# Altium PCB back_STM32F405.PcbDoc (part 1 of 2)
Units mil, origin at the board's own origin, x right, y up, seen from the top; angles counter-clockwise.
Board outline 3149.61 x 3937.01 mil, 4 copper layers (Top Layer, GND02, PWR03, Bottom Layer), stack 23.756 mil thick; 194 components, 149 nets, 1258 pads, 42 vias.
Unrouted connection lines stored in the file: 522.
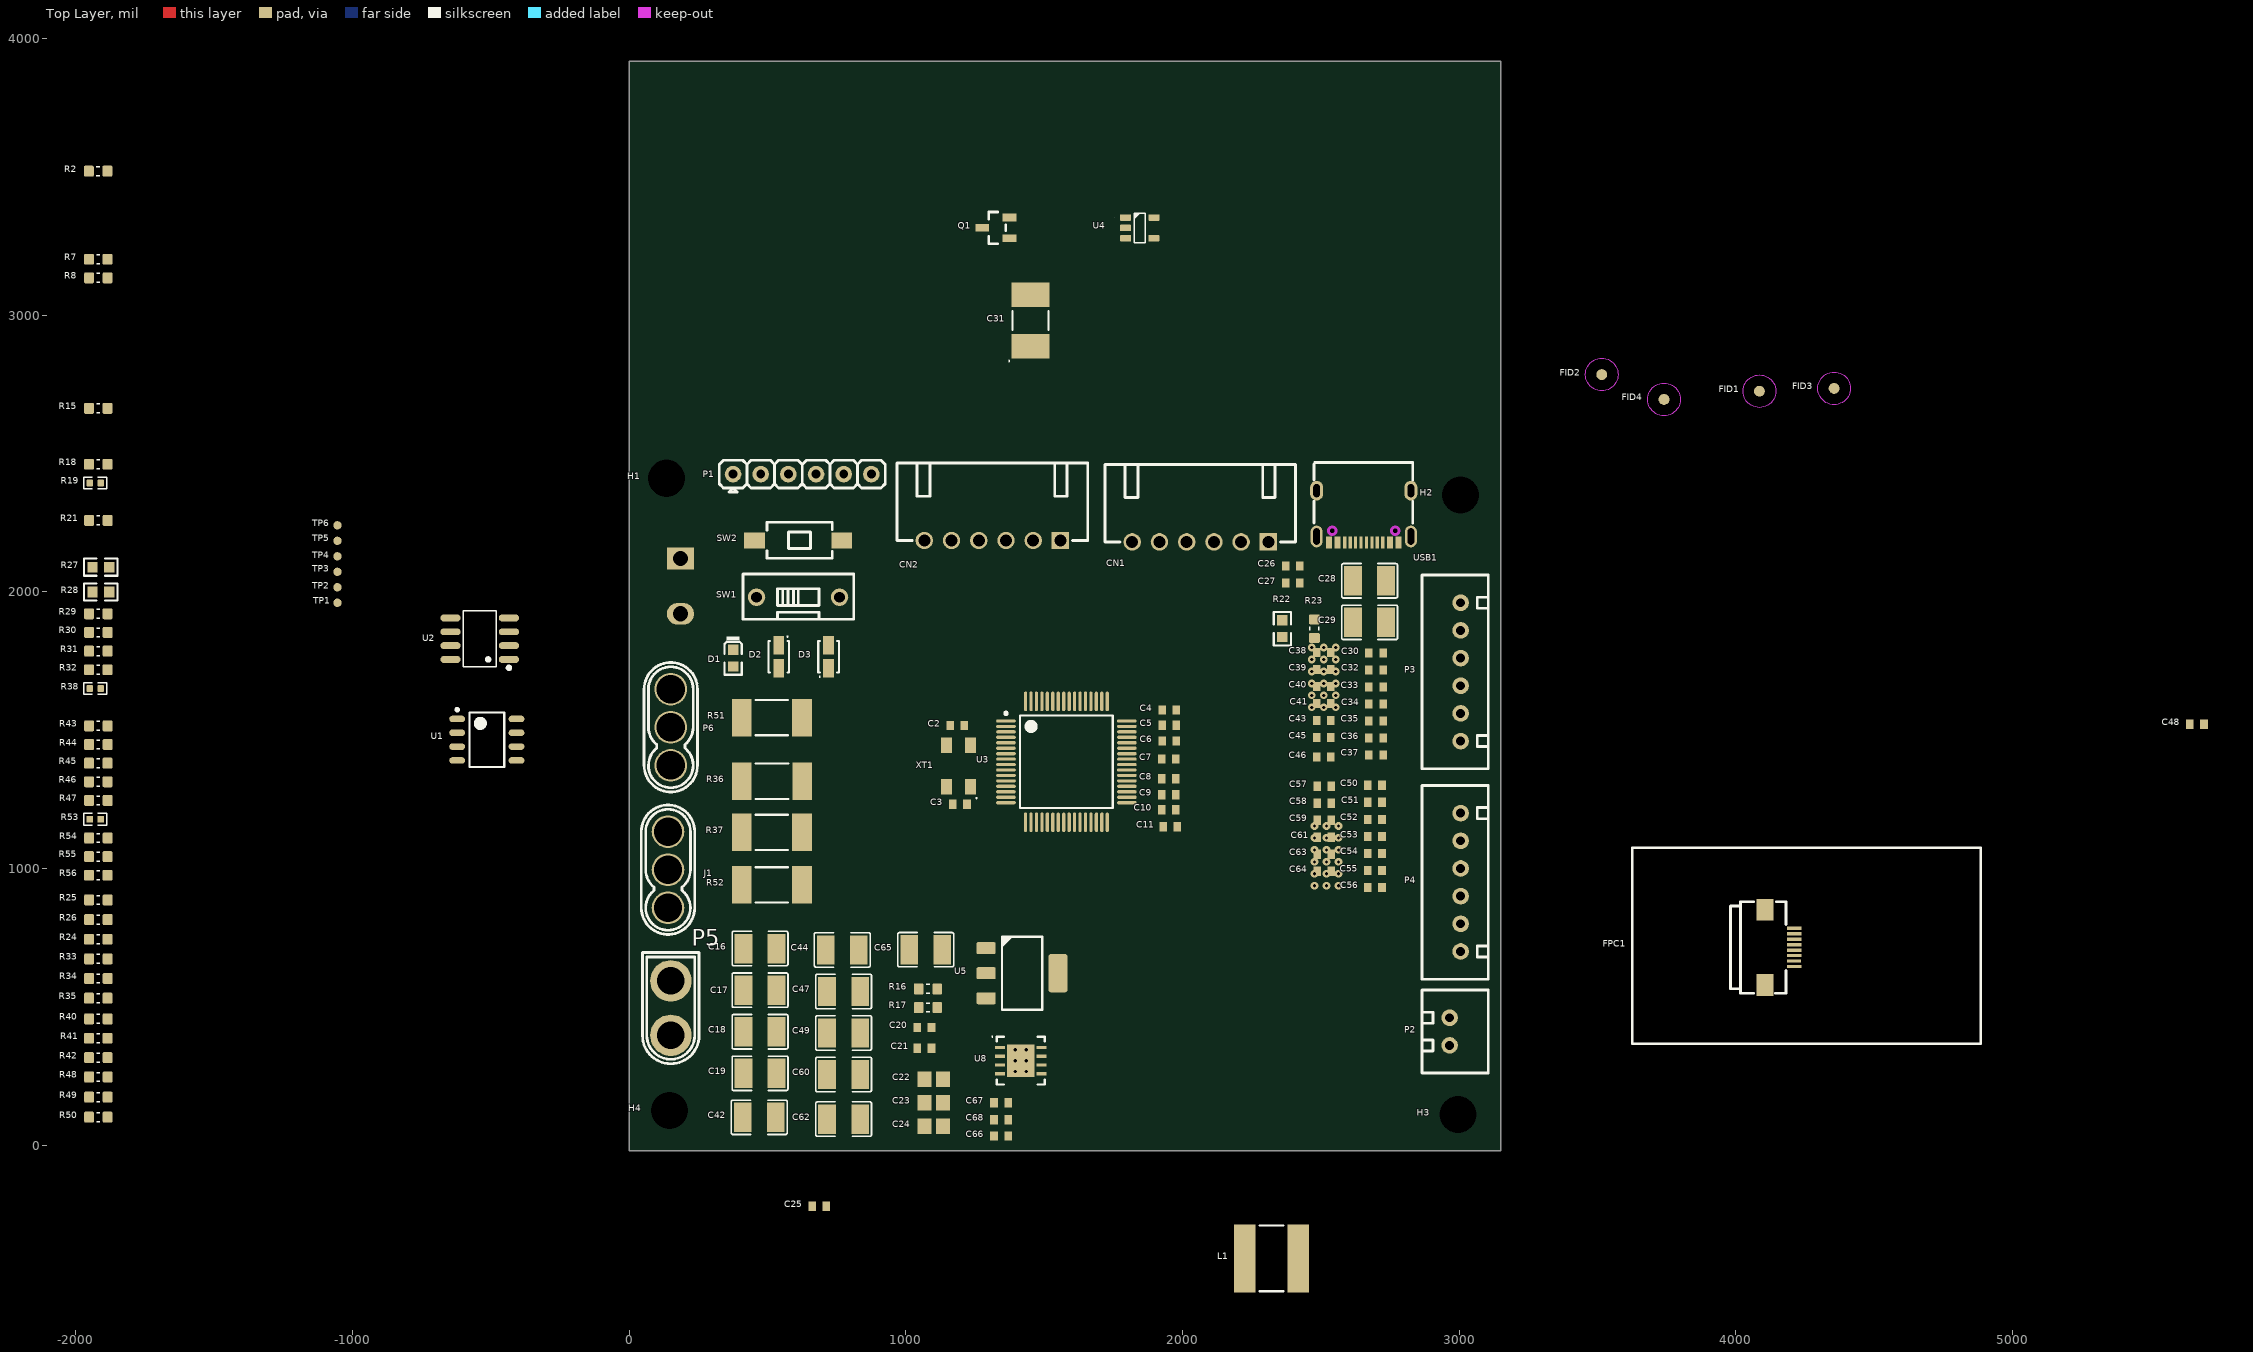
[diagram p0: Top Layer view]
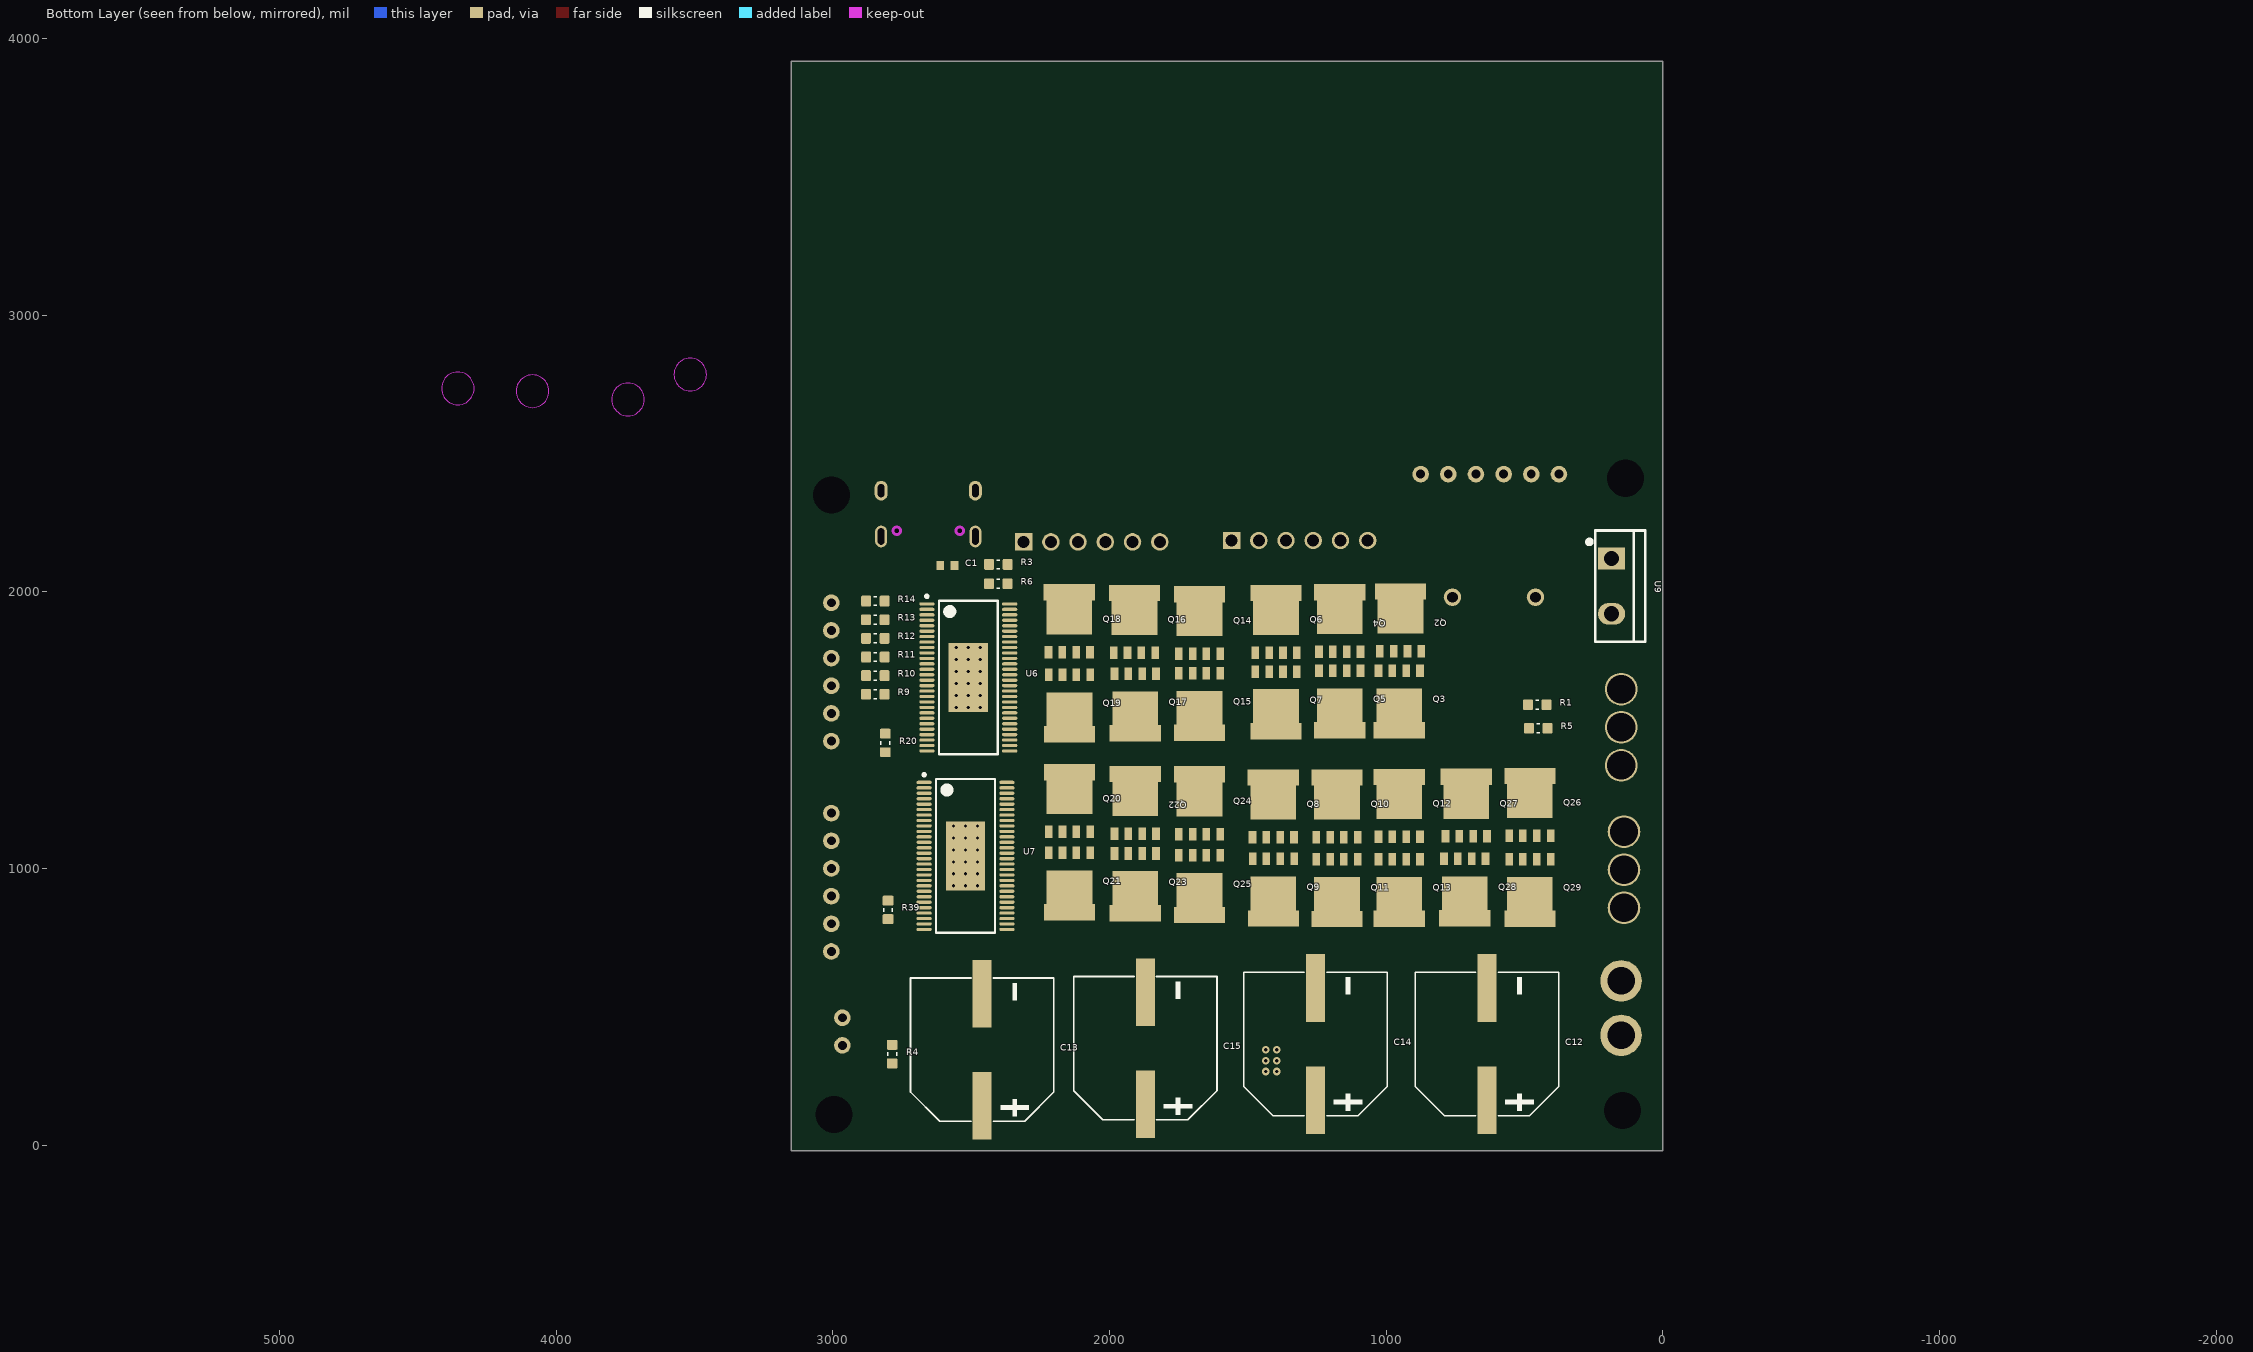
[diagram p1: Bottom Layer view, seen from below]
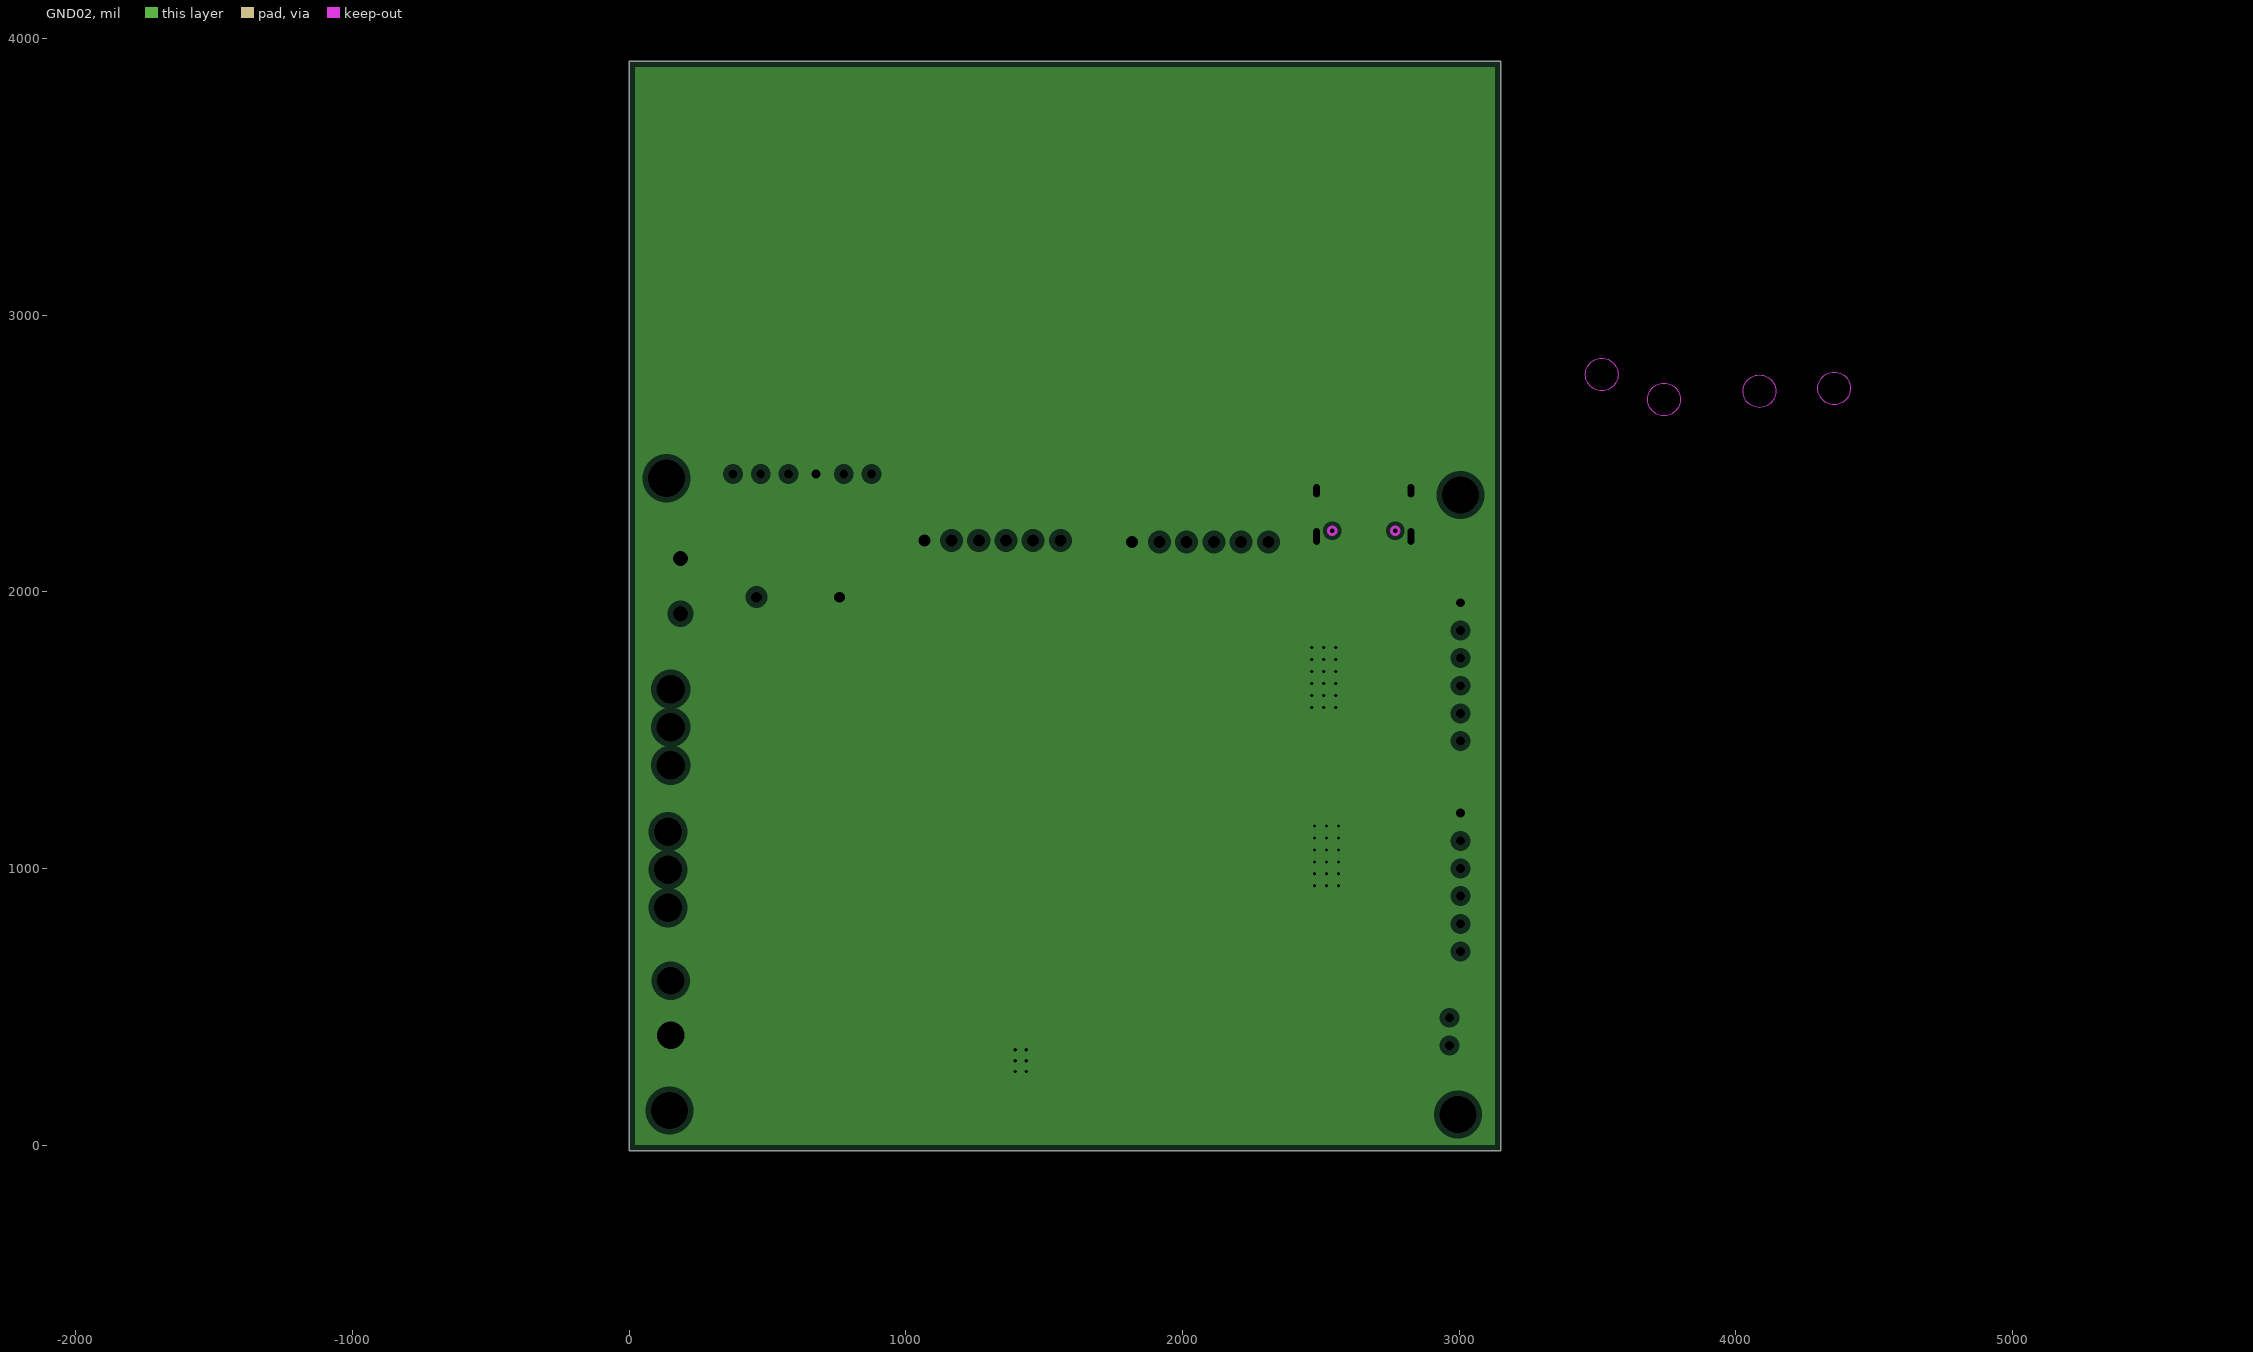
[diagram p2: GND02, clearances drawn from the general rule]
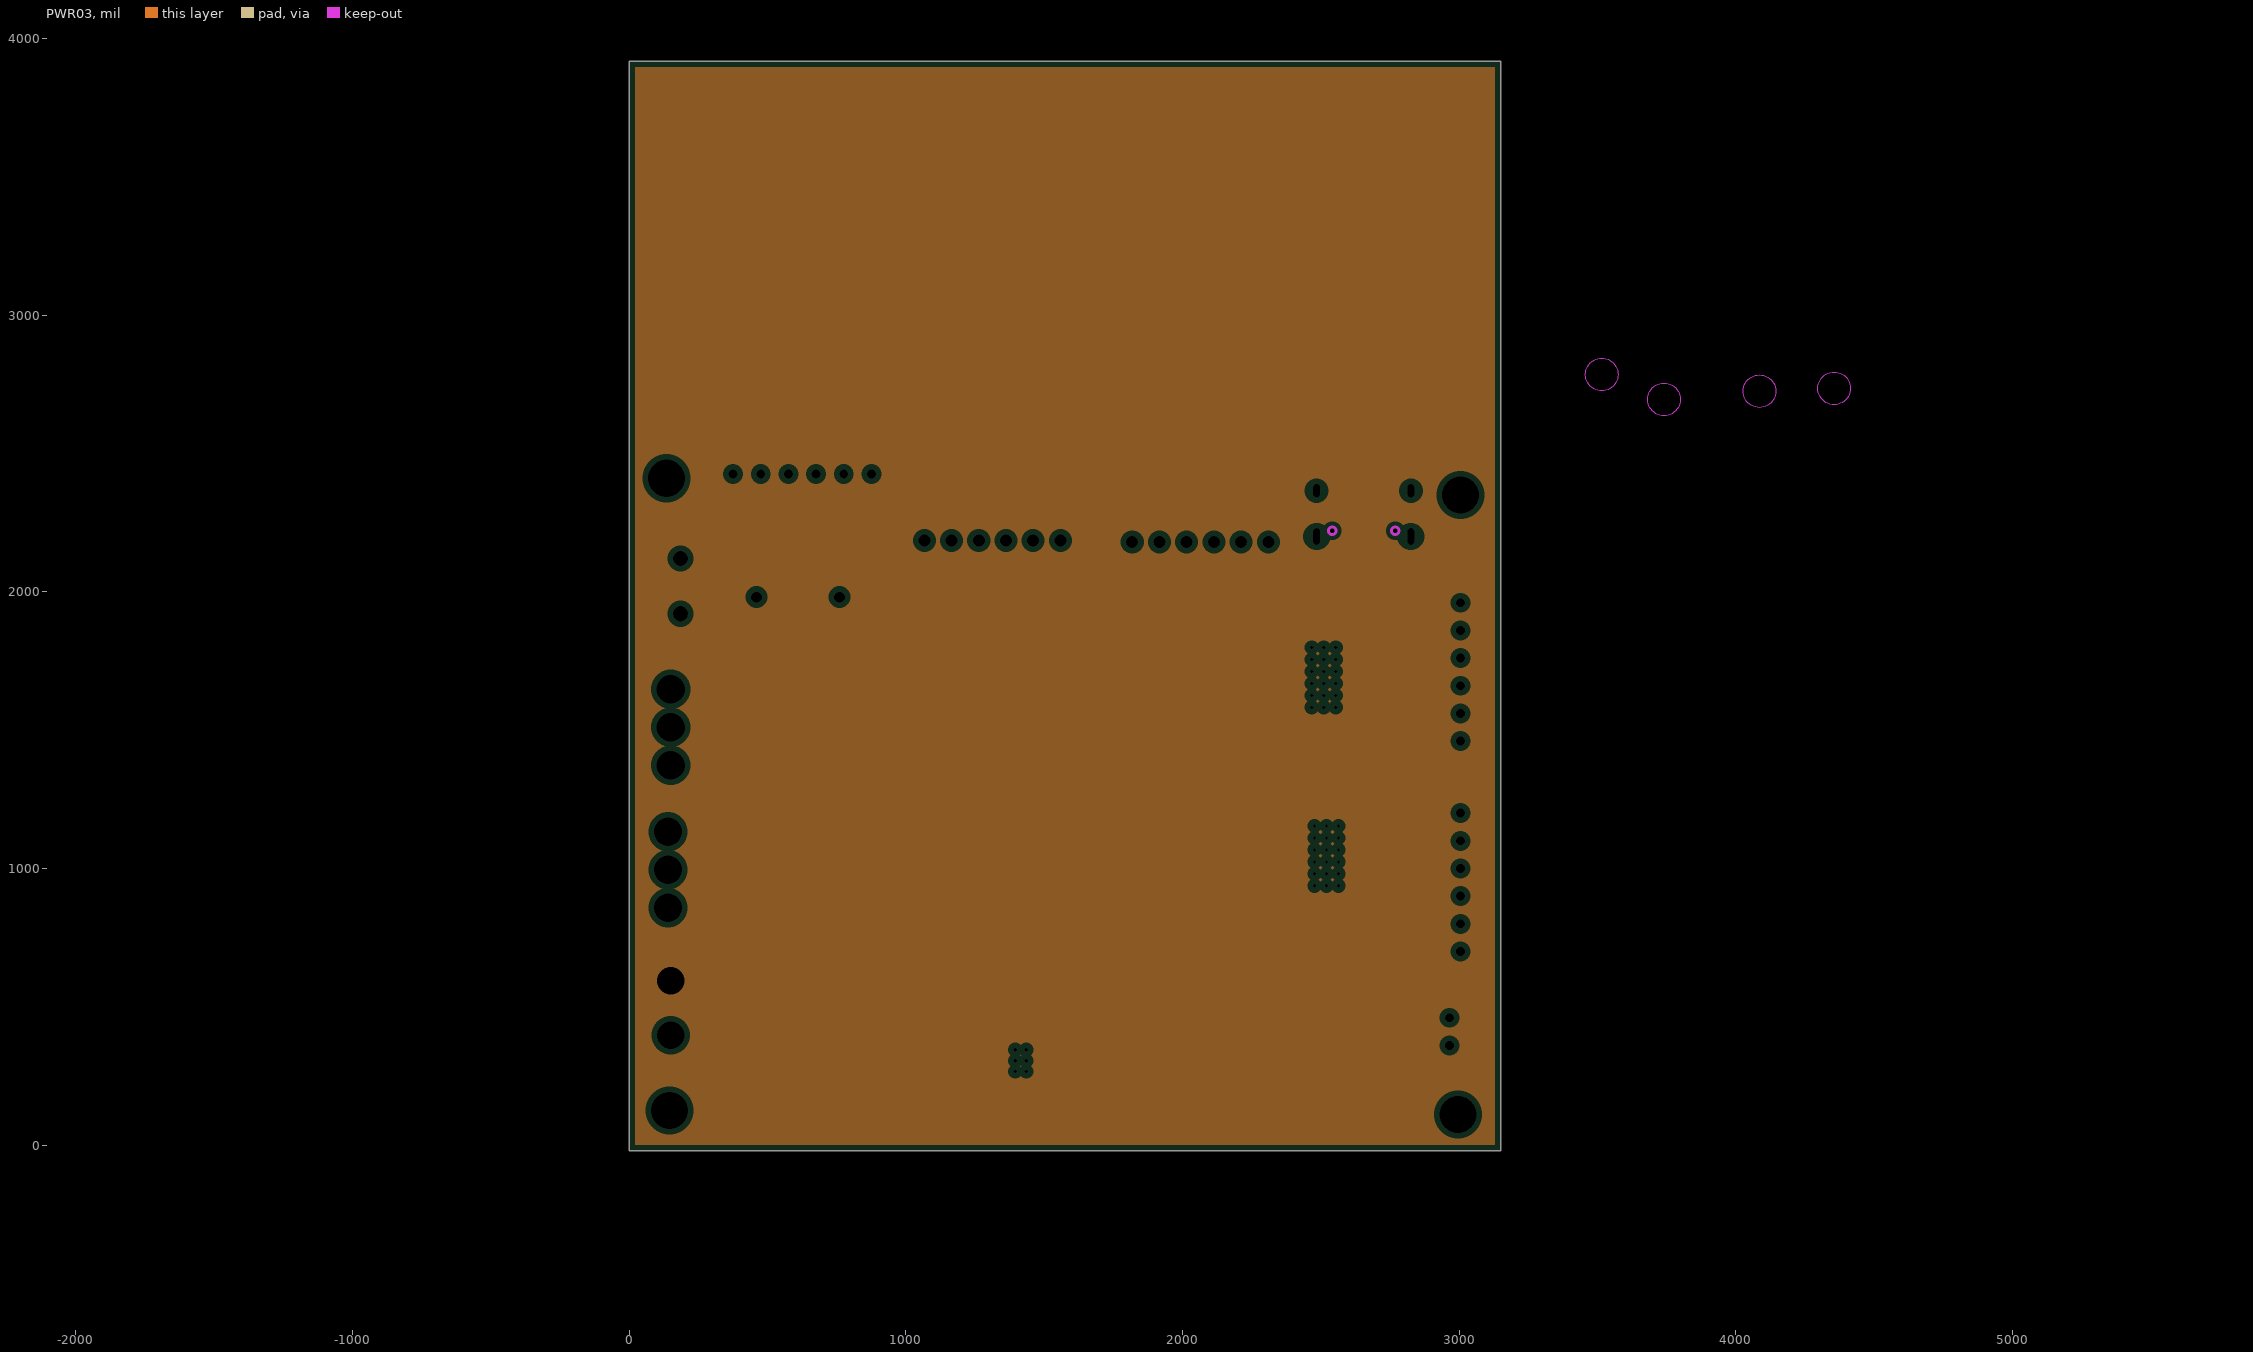
[diagram p3: PWR03, clearances drawn from the general rule]

## Layer stack, top to bottom
Top Solder: solder mask 0.4, Solder Resist, Dk 3.5
Top Layer: signal copper 1.4
Dielectric 2: prepreg 2.8, PP-006, Dk 4.1
GND02: plane copper 1.378, net AGND
Dielectric 1: dielectric 12.6, FR-4, Dk 4.8
PWR03: plane copper 1.378, net DCBUS
Dielectric 3: prepreg 2.8, PP-006, Dk 4.1
Bottom Layer: signal copper 1.4
Bottom Solder: solder mask 0.4, Solder Resist, Dk 3.5

## Board outline
0,-20.29 0,3916.72 3149.61,3916.72 3149.61,-20.29

## Design rules (kind name [scope] priority, off if disabled: settings)
Clearance [All] p1: gap=10 ignorepadtopadclearanceinfootprint=FALSE except(0: Arc-Hole Track-Hole SMDPad-Hole THPad-Hole Via-Hole Fill-Hole Poly-Hole Region-Hole Text-Hole)
PlaneClearance [All] p1: clearance=20
PlaneConnect [All] p1: planeconnectstyle=Relief reliefexpansion=20 reliefentries=4 reliefconductorwidth=10 reliefairgap=10
PolygonConnect [All] p1: connectstyle=Relief reliefconductorwidth=10 reliefentries=4 polygonreliefangle="90 Angle" airgapwidth=10
RoutingVias [All] p1: holewidth=28 width=50 viastyle="Through Hole" minholewidth=28 minwidth=50 maxholewidth=28 maxwidth=50
SolderMaskExpansion [All] p1: expansion=4 istentingtop=FALSE
Width [All] p1: maxlimit=10 minlimit=10 preferedwidth=10
28 further rules are at their usual default settings.

## Classes and differential pairs
component class U_DRV8301_Power: C25 C26 C27 C28 C29 C30 C31 C32 C33 C34 C35 C36 C37 C38 C39 C40 C41 C42 C43 C44 C45 C46 C47 D2 J1 L1 Q2 Q3 Q4 Q5 Q6 Q7 Q8 Q9 Q10 Q11 Q12 Q13 R19 R20 R21 R22 R23 R24 R25 R26 R27 R28 R29 R30 R31 R32 R33 R34 R35 R36 R37 TP3 TP4 U6
component class U_DRV8301_NoPower: C48 C49 C50 C51 C52 C53 C54 C55 C56 C57 C58 C59 C60 C61 C62 C63 C64 C65 P6 Q14 Q15 Q16 Q17 Q18 Q19 Q20 Q21 Q22 Q23 Q24 Q25 R38 R39 R40 R41 R42 R43 R44 R45 R46 R47 R48 R49 R50 R51 R52 TP5 TP6 U7
component class U_AuxHalf: C66 C67 C68 D3 Q26 Q27 Q28 Q29 R53 R54 R55 R56 U8 U9
component class STM32F405: C1 C2 C3 C4 C5 C6 C7 C8 C9 C10 C11 C12 C13 C14 C15 C16 C17 C18 C19 C20 C21 C22 C23 C24 CN1 CN2 D1 FID1 FID2 FID3 FID4 FPC1 H1 H2 H3 H4 P1 P2 P3 P4 P5 Q1 R1 R2 R3 R4 R5 R6 R7 R8 R9 R10 R11 R12 R13 R14 R15 R16 R17 R18 SW1 SW2 TP1 TP2 U1 U2 U3 U4 U5 USB1 XT1

## Components (designator, comment, footprint, x,y, rotation, side; value= is the part's Value field where it differs from the comment)
C1 "0.1uF" CAPC1608X09L 2585.59,2095 r180 bottom
C2 "10pF" CAPC1608X09L 1185.03,1516.66 r0 top
C3 "10pF" CAPC1608X09L 1195.03,1231.94 r180 top
C4 "2.2µF" CAPC1608X09L 1951.77,1572.45 r0 top
C5 "2.2µF" CAPC1608X09L 1951.35,1517.33 r0 top
C6 "0.1uF" CAPC1608X09L 1951.77,1460.24 r0 top
C7 "0.1uF" CAPC1608X09L 1950,1395 r0 top
C8 "0.1uF" CAPC1608X09L 1949.8,1323.55 r0 top
C9 "0.1uF" CAPC1608X09L 1949.8,1266.46 r0 top
C10 "0.1uF" CAPC1608X09L 1949.8,1211.35 r0 top
C11 "0.1uF" CAPC1608X09L 1955,1150 r0 top
C12 "220uF" CAP-SMD_BD12.5-L13.0-W13.0-FD 635,365 r90 bottom
C13 "220uF" CAP-SMD_BD12.5-L13.0-W13.0-FD 2460,345 r90 bottom
C14 "220uF" CAP-SMD_BD12.5-L13.0-W13.0-FD 1255,365 r90 bottom
C15 "220uF" CAP-SMD_BD12.5-L13.0-W13.0-FD 1870,350 r90 bottom
C16 "4.7uF" C1210 472.55,710 r0 top
C17 "4.7uF" C1210 472.55,559.7 r180 top
C18 "4.7uF" C1210 472.55,409.4 r180 top
C19 "4.7uF" C1210 472.55,259.1 r180 top
C20 "2.2µF" CAPC1608X09L 1066.88,425.01 r180 top
C21 "2.2µF" CAPC1608X09L 1066.88,350.01 r180 top
C22 "GRM21BR61H475KE51L" CAPC2012X09N 1100.59,237.71 r0 top value=4.7uF
C23 "GRM21BR61H475KE51L" CAPC2012X09N 1100.59,152.62 r0 top value=4.7uF
C24 "GRM21BR61H475KE51L" CAPC2012X09N 1100.59,67.53 r0 top value=4.7uF
C25 "2.2µF" CAPC1608X09L 686.81,-221.23 r180 top
C26 "270pF" CAPC1608X09L 2398.42,2092.95 r180 top
C27 "82pF" CAPC1608X09L 2398.42,2031.49 r180 top
C28 "4.7uF" C1210 2675.94,2039.46 r180 top
C29 "4.7uF" C1210 2675.94,1889.15 r180 top
C30 "0.1uF" CAPC1608X09L 2698.98,1778.58 r180 top
C31 "68uF" CAPCP6032X28N 1450,2980 r90 top
C32 "0.022µF" CAPC1608X09L 2698.98,1717.12 r180 top
C33 "0.022µF" CAPC1608X09L 2698.98,1655.65 r180 top
C34 "2.2µF" CAPC1608X09L 2698.98,1594.19 r180 top
C35 "2.2µF" CAPC1608X09L 2698.98,1532.72 r180 top
C36 "0.022µF" CAPC1608X09L 2698.98,1471.26 r0 top
C37 "0.022µF" CAPC1608X09L 2698.98,1409.79 r0 top
C38 "2200pF" CAPC1608X09L 2510,1780 r180 top
C39 "2.2µF" CAPC1608X09L 2510,1718.54 r180 top
C40 "2.2µF" CAPC1608X09L 2510,1657.07 r180 top
C41 "2200pF" CAPC1608X09L 2510,1595.61 r180 top
C42 "4.7uF" C1210 469.74,100 r180 top
C43 "2.2µF" CAPC1608X09L 2510,1534.14 r180 top
C44 "4.7uF" C1210 769.74,705 r180 top
C45 "2200pF" CAPC1608X09L 2510,1472.68 r180 top
C46 "2200pF" CAPC1608X09L 2510,1402.6 r180 top
C47 "4.7uF" C1210 774.74,555 r180 top
C48 "2.2µF" CAPC1608X09L 5666.1,1521.21 r180 top
C49 "4.7uF" C1210 774.74,405 r180 top
C50 "0.022µF" CAPC1608X09L 2695.03,1299.92 r180 top
C51 "0.022µF" CAPC1608X09L 2695.03,1238.46 r180 top
C52 "2.2µF" CAPC1608X09L 2695.03,1176.99 r180 top
C53 "2.2µF" CAPC1608X09L 2695.03,1115.53 r180 top
C54 "0.022µF" CAPC1608X09L 2695.03,1054.06 r180 top
C55 "0.022µF" CAPC1608X09L 2695.03,992.6 r180 top
C56 "2200pF" CAPC1608X09L 2695.03,931.13 r180 top
C57 "2.2µF" CAPC1608X09L 2511.81,1296.73 r180 top
C58 "2.2µF" CAPC1608X09L 2511.81,1235.27 r180 top
C59 "2200pF" CAPC1608X09L 2511.81,1173.8 r180 top
C60 "4.7uF" C1210 774.74,255 r180 top
C61 "2.2µF" CAPC1608X09L 2511.81,1112.34 r180 top
C62 "4.7uF" C1210 774.74,93.65 r180 top
C63 "2200pF" CAPC1608X09L 2511.81,1050.87 r180 top
C64 "2200pF" CAPC1608X09L 2511.81,989.41 r180 top
C65 "4.7uF" C1210 1071.56,705.9 r180 top
C66 "2.2µF" CAPC1608X09L 1343.78,32.31 r180 top
C67 "0.1uF" CAPC1608X09L 1343.78,152.62 r180 top
C68 "2.2µF" CAPC1608X09L 1343.78,91.15 r180 top
CN1 "X8821WR-06S-N0SN" CONN-TH_6P-P2.50_X8821WR-06S-N2SN 2063.93,2180 r180 top
CN2 "X8821WR-06S-N0SN" CONN-TH_6P-P2.50_X8821WR-06S-N2SN 1312.36,2185 r180 top
D1 "绿灯 0603" 0603_LED_S1 375.31,1760 r270 top
D2 "MBR140SFT1G" DIOM2717X10N 540.31,1765 r270 top
D3 "MBR140SFT1G" DIOM2717X10N 720.31,1765 r90 top
FID1 "FIDUCIAL" FIDUCIAL 4085,2724.69 r0 top
FID2 "FIDUCIAL" FIDUCIAL 3515,2784.97 r90 top
FID3 "FIDUCIAL" FIDUCIAL 4355,2734.97 r90 top
FID4 "FIDUCIAL" FIDUCIAL 3740,2694.97 r90 top
FPC1 "AFC01-S08FCA-00" FPC-SMD_P0.50-8P_FGS-XJ-H2.0 4157.75,714.18 r90 top
H1 "M3 Hole" "M3 Hole" 135,2410 r0 top
H2 "M3 Hole" "M3 Hole" 3005,2350 r0 top
H3 "M3 Hole" "M3 Hole" 2995,110 r0 top
H4 "M3 Hole" "M3 Hole" 145,125 r0 top
J1 "M3—DCBUS" CONN-TH_MR30-M 140,995 r90 top (schematic designator P5)
L1 "22uH" INDC6060X28N 2321.85,-410 r180 top
P1 "Header 6" SIP-6 625,2425 r0 top
P2 "Header 2" XH254-2 2965,410 r270 top
P3 "Header 6" XH254-6 3005,1710 r90 top
P4 "Header 6" XH254-6 3005,949.53 r90 top
P5 "Header 2" CONN-TH_XT30U-M 150,495 r270 top
P6 "Header 3" CONN-TH_MR30-M 150,1510 r90 top
Q1 "8550_SMT" SOT-23(SOT-23-3) 1325,3315 r0 top
Q2 "NTMFS5C628NLT" SO8FL 947.31,1892.68 r180 bottom
Q3 "NTMFS5C628NLT" SO8FL 952.31,1607.21 r0 bottom
Q4 "NTMFS5C628NLT" SO8FL 1167.31,1890.13 r180 bottom
Q5 "NTMFS5C628NLT" SO8FL 1167.31,1607.21 r0 bottom
Q6 "NTMFS5C628NLT" SO8FL 1397.31,1887.25 r180 bottom
Q7 "NTMFS5C628NLT" SO8FL 1397.59,1604.14 r0 bottom
Q8 "NTMFS5C628NLT" SO8FL 1407.59,1220.13 r180 bottom
Q9 "NTMFS5C628NLT" SO8FL 1407.31,927.21 r0 bottom
Q10 "NTMFS5C628NLT" SO8FL 1177.31,1220.13 r180 bottom
Q11 "NTMFS5C628NLT" SO8FL 1177.31,925.4 r0 bottom
Q12 "NTMFS5C628NLT" SO8FL 952.31,1222.13 r180 bottom
Q13 "NTMFS5C628NLT" SO8FL 952.31,925.68 r0 bottom
Q14 "NTMFS5C628NLT" SO8FL 1674.21,1882.72 r180 bottom
Q15 "NTMFS5C628NLT" SO8FL 1674.21,1597.88 r0 bottom
Q16 "NTMFS5C628NLT" SO8FL 1909.35,1886.82 r180 bottom
Q17 "NTMFS5C628NLT" SO8FL 1906.5,1596.07 r0 bottom
Q18 "NTMFS5C628NLT" SO8FL 2145.18,1889.16 r180 bottom
Q19 "NTMFS5C628NLT" SO8FL 2144.49,1592.88 r0 bottom
Q20 "NTMFS5C628NLT" SO8FL 2144.49,1239.53 r180 bottom
Q21 "NTMFS5C628NLT" SO8FL 2144.49,949.53 r0 bottom
Q22 "NTMFS5C628NLT" SO8FL 1906.5,1233 r180 bottom
Q23 "NTMFS5C628NLT" SO8FL 1906.5,946.35 r0 bottom
Q24 "NTMFS5C628NLT" SO8FL 1674.21,1231.27 r180 bottom
Q25 "NTMFS5C628NLT" SO8FL 1674.21,939.81 r0 bottom
Q26 "NTMFS5C628NLT" SO8FL 480.18,1225.4 r180 bottom
Q27 "NTMFS5C628NLT" SO8FL 710.18,1222.53 r180 bottom
Q28 "NTMFS5C628NLT" SO8FL 715.45,927.49 r0 bottom
Q29 "NTMFS5C628NLT" SO8FL 480.18,925.95 r0 bottom
R1 "22R" RESC1608X55N 453.54,1591.46 r180 bottom
R2 "1k" RESC1608X55N -1920,3520 r0 top
R3 "22R" RESC1608X55N 2401.46,2098.54 r180 bottom
R4 "120R" RESC1608X55N 2785,328.46 r90 bottom
R5 "22R" RESC1608X55N 450.07,1506.46 r180 bottom
R6 "22R" RESC1608X55N 2401.46,2028.54 r180 bottom
R7 "10K" RESC1608X55N -1919.25,3201.78 r0 top
R8 "22R" RESC1608X55N -1919.25,3134.41 r0 top
R9 "3.3k" RESC1608X55N 2846,1629.26 r0 bottom
R10 "3.3k" RESC1608X55N 2846,1696.63 r180 bottom
R11 "3.3k" RESC1608X55N 2846,1764 r0 bottom
R12 "3.3k" RESC1608X55N 2846,1831.37 r180 bottom
R13 "3.3k" RESC1608X55N 2846,1898.74 r180 bottom
R14 "3.3k" RESC1608X55N 2846,1966.11 r180 bottom
R15 "47K" RESC1608X55N -1919.25,2662.82 r180 top
R16 "10K" RESC1608X55N 1079.45,564.17 r180 top
R17 "1k" RESC1608X55N 1079.45,496.8 r180 top
R18 "1k" RESC1608X55N -1919.25,2460.71 r180 top
R19 "NCP15XH103F03RC" RESC1005X40N -1930.59,2392.87 r180 top value=10k
R20 "3.3k" RESC1608X55N 2810,1453.46 r270 bottom
R21 "220k" RESC1608X55N -1919.25,2257.66 r180 top
R22 "18k" 0603_R 2360.39,1866.38 r270 top
R23 "47K" RESC1608X55N 2476.14,1866.37 r270 top
R24 "2.2R" RESC1608X55N -1919.25,743.74 r180 top
R25 "2.2R" RESC1608X55N -1919.25,885.74 r180 top
R26 "2.2R" RESC1608X55N -1919.25,814.74 r180 top
R27 "3.3k" 0603_R -1910.06,2088.86 r180 top
R28 "18k" 0603_R -1910.06,1998.78 r180 top
R29 "120R" RESC1608X55N -1919.25,1920.05 r180 top
R30 "120R" RESC1608X55N -1919.25,1852.68 r180 top
R31 "22R" RESC1608X55N -1919.25,1785.31 r180 top
R32 "22R" RESC1608X55N -1919.25,1717.94 r180 top
R33 "2.2R" RESC1608X55N -1919.25,672.74 r180 top
R34 "2.2R" RESC1608X55N -1919.25,601.74 r180 top
R35 "2.2R" RESC1608X55N -1919.25,530.74 r180 top
R36 "CSR2512C0R0005F" RESC6432X09N 515.31,1315 r180 top value=500uOhm
R37 "CSR2512C0R0005F" RESC6432X09N 515,1130 r180 top value=500uOhm
R38 "NCP15XH103F03RC" RESC1005X40N -1930.59,1650.11 r180 top value=10k
R39 "3.3k" RESC1608X55N 2800,850 r270 bottom
R40 "2.2R" RESC1608X55N -1919.25,455.74 r180 top
R41 "2.2R" RESC1608X55N -1919.25,385.74 r180 top
R42 "2.2R" RESC1608X55N -1919.25,315.74 r180 top
R43 "18k" RESC1608X55N -1919.25,1514.9 r180 top
R44 "120R" RESC1608X55N -1919.25,1447.53 r180 top
R45 "120R" RESC1608X55N -1919.25,1380.16 r180 top
R46 "22R" RESC1608X55N -1919.25,1312.79 r180 top
R47 "22R" RESC1608X55N -1919.25,1245.42 r180 top
R48 "2.2R" RESC1608X55N -1919.25,245.74 r180 top
R49 "2.2R" RESC1608X55N -1919.25,173.11 r180 top
R50 "2.2R" RESC1608X55N -1919.25,100.74 r180 top
R51 "CSR2512C0R0005F" RESC6432X09N 515,1545 r180 top value=500uOhm
R52 "CSR2512C0R0005F" RESC6432X09N 515,940 r180 top value=500uOhm
R53 "NCP15XH103F03RC" RESC1005X40N -1930.59,1177.58 r180 top value=10k
R54 "2.2R" RESC1608X55N -1919.25,1109.74 r180 top
R55 "3.3k" RESC1608X55N -1919.25,1042.37 r180 top
R56 "2.2R" RESC1608X55N -1919.25,975 r180 top
SW1 "DSWB01LHGET" SW-TH_DSWB01LHGET 610,1980 r90 top
SW2 "TS-1101-C-W" SW-SMD_L6.0-W3.3-LS8.0 610,2185 r180 top
TP1 "TESTPOINT" TP-R30 -1055,1959.98 r90 top
TP2 "TESTPOINT" TP-R30 -1055,2015.99 r90 top
TP3 "TESTPOINT" TP-R30 -1055,2071.99 r90 top
TP4 "TESTPOINT" TP-R30 -1055,2127.99 r90 top
TP5 "TESTPOINT" TP-R30 -1055,2184 r90 top
TP6 "TESTPOINT" TP-R30 -1055,2240 r90 top
U1 "SN65HVD232D" SOIC127P600X175-8N -515,1465 r0 top
U2 "CH340N" "ch340N  SOP-8_L4.9-W3.9-P1.27-LS6.0-BL" -540.61,1830 r90 top
U3 "STM32F405RGT6" STM-LQFP64_N 1580,1385 r0 top
U4 "3.3V" SOT23-5 1845,3315 r0 top
U5 "3.3V" SOT223 1419.79,620.91 r0 top
U6 "DRV8301" TSSOP50P810X120_HS-57N 2510,1690 r180 bottom
U7 "DRV8301" TSSOP50P810X120_HS-57N 2520,1045 r180 bottom
U8 "LM5109BSD/NOPB" SON80P400X80_HS-9N 1415,305 r0 top
U9 "3Ω" TO-220-2L_L10.2-W4.6-P5.08-L 185,2020 r270 bottom
USB1 "TYPE-C 16PIN 2MD(073)" USB-C-SMD_TYPE-C-16PIN-2MD-073 2782.68,2177.01 r180 top
XT1 "8 MHz" DFN220P320X110-4N 1190,1370 r90 top

## Footprints (in the part's own frame and the unit in brackets; to place one, negate y for a bottom-side part, rotate by r counter-clockwise, add the part's x,y. Pads: shape width x height; smd on the part's side, far side on the other; paste and mask are expansions set on the pad)
0603_LED_S1 [mm]
  rect 0.93x0.98 smd: A(0.77,0) K(-0.77,0)
  silkscreen extent -1.97,-0.79 1.54,0.79, body extent -0.8,-0.4 0.8,0.4, height 0.6
0603_R [mm]
  rect 0.93x0.98 smd: 1(-0.77,0) 2(0.77,0)
  silkscreen extent -1.53,-0.79 1.54,0.79, body extent -0.85,-0.4 0.85,0.4, height 0.56
C1210 [mm]
  rect 1.635x2.7 smd paste-100 mask+0.051: 1(-1.517,0) 2(1.517,0)
  silkscreen extent -2.56,-1.58 2.56,1.58
CAP-SMD_BD12.5-L13.0-W13.0-FD [mm] "220uF 63V 贴片电容"
  rect 6.2x1.75 smd: 1(-5.145,0) 2(5.145,0)
  silkscreen extent -6.58,-6.58 6.58,6.58
CAPC1608X09L [mm] "Chip Capacitor, 2-Leads, Body 1.60x0.80mm, IPC High Density"
  rect 0.7x0.85 smd: 1(-0.65,0) 2(0.65,0)
  body extent -0.85,-0.45 0.85,0.45, height 0.9
CAPC2012X09N [mm] "Chip Capacitor, 2-Leads, Body 2.00x1.25mm, IPC Medium Density"
  rect 1.25x1.45 smd: 1(-0.85,0) 2(0.85,0)
  body extent -1.08,-0.7 1.07,0.7, height 0.95
CAPCP6032X28N [mm]
  rect 2.25x3.5 smd: 1(-2.375,0) 2(2.375,0)
  silkscreen extent -3.76,-1.65 0.85,2.01, body extent -3.15,-1.75 3.15,1.75, height 2.8
"ch340N  SOP-8_L4.9-W3.9-P1.27-LS6.0-BL" [mm]
  oval 0.63x1.865 smd: 1(-1.905,-2.682) 2(-0.635,-2.682) 3(0.635,-2.682) 4(1.905,-2.682) 5(1.905,2.682) 6(0.635,2.682) 7(-0.635,2.682) 8(-1.905,2.682)
  silkscreen extent -2.82,-2.83 2.58,1.52
CONN-TH_6P-P2.50_X8821WR-06S-N2SN [mm] "90度 弯插 6p"
  rect 1.6x1.6 hole 1.1: 1(-6.25,0)
  round 1.6 hole 1.1: 2(-3.75,0) 3(-1.25,0) 4(1.25,0) 5(3.75,0) 6(6.25,0)
  silkscreen extent -8.75,-7.11 8.75,0
CONN-TH_MR30-M [mm] "MR30航模电机插头"
  round 3 hole 2.6 paste-2539.97 mask+0.05: 1(-3.5,0) 2(0,0) 3(3.5,0)
  silkscreen extent -5.94,-2.45 5.94,2.45
CONN-TH_XT30U-M [mm] "xt30 插头"
  round 3.8 hole 2.54 paste-2539.97 mask+0.05: 1(-2.5,0) 2(2.5,0)
  silkscreen extent -5.1,-2.6 5.11,2.6
DFN220P320X110-4N [mm] "DFN, 4-Leads, Body 5.00x3.20mm, Pitch 2.20mm, IPC Medium Density"
  rect 1.4x1 smd: 1(-1.9,-1.1) 3(1.9,1.1) G(-1.9,1.1) G(1.9,-1.1)
  silkscreen extent -3,-1.7 -2.9,-1.6, body extent -2.55,-1.65 2.55,1.65, height 1.1
DIOM2717X10N [mm] "Molded Diode, 2-Leads, Body 2.70x1.65mm, IPC Medium Density"
  rect 1.7x1 smd: A(1.05,0) K(-1.05,0)
  silkscreen extent -1.9,-0.95 1.45,0.95, body extent -1.45,-0.9 1.45,0.9, height 1
FIDUCIAL [mm] "1mm fiducial with 3mm keepout"
  round 1 smd paste-1 mask+0.5: 0(0,0)
  Keep-Out Layer region: 0,-1.5 -0.574,-1.386 -1.061,-1.061 -1.386,-0.574 -1.5,0 -1.5,0 -1.386,0.574 -1.061,1.061 -0.574,1.386 0,1.5 0,1.5 0.574,1.386 1.061,1.061 1.386,0.574 1.5,0 1.5,0 1.386,-0.574 1.061,-1.061 0.574,-1.386 0,-1.5
FPC-SMD_P0.50-8P_FGS-XJ-H2.0 [mm]
  rect 0.3x1.3 smd paste+0 mask+0.05: 1(-1.75,-1.34) 2(-1.252,-1.338) 3(-0.75,-1.34) 4(-0.25,-1.34) 5(0.25,-1.34) 6(0.75,-1.34) 7(1.25,-1.34) 8(1.75,-1.34)
  rect 2x1.6 smd: 9(3.45,1.34) 10(-3.45,1.34)
  silkscreen extent -8.85,-18.47 9.15,13.52
INDC6060X28N [mm]
  rect 1.98x6.22 smd: 1(-2.46,0) 2(2.46,0)
  silkscreen extent -1.1,-3.01 1.1,3.01, body extent -3.1,-3.1 3.1,3.1, height 2.8
"M3 Hole" [mm] "M3 Hole with no copper"
  round 3 hole 3.4 unplated: 1(0,0)
RESC1005X40N [mm]
  round 0.2 on Mech15: 0(0,0)
  rrect20% 0.6x0.6 smd: 1(-0.5,0) 2(0.5,0)
  Top Layer pour cut-out: -0.325,0.375 -0.2,0.5 0.2,0.5 0.325,0.375 0.325,-0.375 0.2,-0.5 -0.2,-0.5 -0.325,-0.375
  silkscreen extent -1.05,-0.55 1.05,0.55, body extent -0.52,-0.27 0.53,0.28, height 0.4
RESC1608X55N [mm]
  round 0.254 on Mech15: 0(0,0)
  rrect25% 0.9x1 smd: 1(-0.85,0) 2(0.85,0)
  Top Layer pour cut-out: -0.6,0.5 -0.4,0.7 0.4,0.7 0.6,0.5 0.6,-0.5 0.4,-0.7 -0.4,-0.7 -0.6,-0.5
  silkscreen extent -0.15,-0.41 0.15,0.41, body extent -0.87,-0.47 0.88,0.48, height 0.54
RESC6432X09N [mm] "Chip Resistor, 2-Leads, Body 6.40x3.20mm, IPC Medium Density"
  rect 1.8x3.45 smd: 1(-2.775,0) 2(2.775,0)
  silkscreen extent -1.5,-1.63 1.5,1.63, body extent -3.32,-1.73 3.32,1.73, height 0.9
SIP-6 [mil]
  round 60 hole 32: 1(-250,0) 2(-150,0) 3(-50,0) 4(50,0) 5(150,0) 6(250,0)
  silkscreen extent -300,-65 300,50
SO8FL [mm] "DFN5 5x6, 1.27P  (SO-8FL)  CASE 488AA"
  rect 0.9x0.6 on Bottom Paste: 7(0,-0.55) 7(0,0.3) 7(0,1.15) 7(0,2) 9(-1.15,-0.55) 9(-1.15,0.3) 9(-1.15,1.15) 9(-1.15,2) 10(1.15,-0.55) 10(1.15,0.3) 10(1.15,1.15) 10(1.15,2)
  rect 0.6x0.9 on Bottom Paste: 11(-1.875,3) 11(-0.65,3) 11(0.65,3) 11(1.875,3)
  rect 4.2x2.2 smd paste-10 mask+0.075: D(0,0) D(0,1.35)
  rect 4.7x1.5 smd paste-10 mask+0.075: D(0,2.75)
  rect 0.7x1.15 smd paste-0.05 mask+0.075: G(1.905,-2.725) S(-1.905,-2.725) S(-0.635,-2.725) S(0.635,-2.725)
  body extent -2.57,-2.95 2.58,3.2, height 1.13
SOIC127P600X175-8N [mm] "SOIC, 8-Leads, Body 4.90x3.90mm, Pitch 1.27mm, IPC Medium Density"
  oval 1.45x0.6 smd: 1(-2.725,1.905) 2(-2.725,0.635) 3(-2.725,-0.635) 4(-2.725,-1.905) 5(2.725,-1.905) 6(2.725,-0.635) 7(2.725,0.635) 8(2.725,1.905)
  silkscreen extent -2.85,-2.5 1.6,2.88, body extent -2,-2.5 2,2.5, height 1.75
SON80P400X80_HS-9N [mm] "SON, 8-Leads, Body 4.00x4.00mm, Pitch 0.80mm, Thermal Pad 3.00x2.49mm, IPC Medium Density"
  rect 0.9x0.3 smd mask+0: 1(-1.895,1.2) 2(-1.895,0.4) 3(-1.895,-0.4) 4(-1.895,-1.2) 5(1.895,-1.2) 6(1.895,-0.4) 7(1.895,0.4) 8(1.895,1.2)
  rect 2.49x3 smd paste-1.245 mask+0: 9(0,0)
  silkscreen extent -2.65,-2.2 2.2,2.25, body extent -2.05,-2.05 2.05,2.05, height 0.8
SOT23-5 [mm]
  round 0.5 on Mech15: 0(0,0)
  rrect25% 1x0.6 smd: 1(-1.3,0.95) 2(-1.3,0) 3(-1.3,-0.95) 4(1.3,-0.95) 5(1.3,0.95)
  silkscreen extent -0.51,-1.35 0.51,1.35, body extent -1.4,-1.45 1.4,1.45, height 1.44
SOT223 [mm]
  round 1 on Mech15: 0(0,0)
  rrect25% 1.75x1.1 smd: 1(-3.3,2.3) 2(-3.3,0) 3(-3.3,-2.3)
  rrect25% 1.75x3.5 smd: 4(3.3,0)
  silkscreen extent -1.85,-3.35 1.85,3.35, body extent -3.65,-3.35 3.65,3.35, height 1.8
SOT-23(SOT-23-3) [mm]
  rect 1.25x0.7 smd: 1(1.25,-0.95) 2(1.25,0.95) 3(-1.25,0)
  silkscreen extent -0.65,-1.46 0.9,1.46, body extent -1.5,-1.5 1.5,1.5, height 1.3
STM-LQFP64_N [mm]
  oval 1.8x0.3 smd: 1(-5.55,3.75) 2(-5.55,3.25) 3(-5.55,2.75) 4(-5.55,2.25) 5(-5.55,1.75) 6(-5.55,1.25) 7(-5.55,0.75) 8(-5.55,0.25) 9(-5.55,-0.25) 10(-5.55,-0.75) 11(-5.55,-1.25) 12(-5.55,-1.75) 13(-5.55,-2.25) 14(-5.55,-2.75) 15(-5.55,-3.25) 16(-5.55,-3.75) 33(5.55,-3.75) 34(5.55,-3.25) 35(5.55,-2.75) 36(5.55,-2.25) 37(5.55,-1.75) 38(5.55,-1.25) 39(5.55,-0.75) 40(5.55,-0.25) 41(5.55,0.25) 42(5.55,0.75) 43(5.55,1.25) 44(5.55,1.75) 45(5.55,2.25) 46(5.55,2.75) 47(5.55,3.25) 48(5.55,3.75)
  oval 0.3x1.8 smd: 17(-3.75,-5.55) 18(-3.25,-5.55) 19(-2.75,-5.55) 20(-2.25,-5.55) 21(-1.75,-5.55) 22(-1.25,-5.55) 23(-0.75,-5.55) 24(-0.25,-5.55) 25(0.25,-5.55) 26(0.75,-5.55) 27(1.25,-5.55) 28(1.75,-5.55) 29(2.25,-5.55) 30(2.75,-5.55) 31(3.25,-5.55) 32(3.75,-5.55) 49(3.75,5.55) 50(3.25,5.55) 51(2.75,5.55) 52(2.25,5.55) 53(1.75,5.55) 54(1.25,5.55) 55(0.75,5.55) 56(0.25,5.55) 57(-0.25,5.55) 58(-0.75,5.55) 59(-1.25,5.55) 60(-1.75,5.55) 61(-2.25,5.55) 62(-2.75,5.55) 63(-3.25,5.55) 64(-3.75,5.55)
  silkscreen extent -5.67,-4.25 4.25,4.57, body extent -5,-5 5,5, height 1.6
SW-SMD_L6.0-W3.3-LS8.0 [mm] "轻触开关"
  rect 1.9x1.5 smd: 1(-4,0) 2(4,0)
  silkscreen extent -3.14,-1.67 2.86,1.63
SW-TH_DSWB01LHGET [mm] "单刀拨码开关"
  round 1.6 hole 1: 1(0,3.81) 2(0,-3.81)
  silkscreen extent -2.02,-5.11 2.13,5.05
TO-220-2L_L10.2-W4.6-P5.08-L [mm] "220封装2插电阻"
  rect 2x2.5 hole 1.4: 1(-2.54,0)
  oval 2x2.5 hole 1.4: 2(2.54,0)
  silkscreen extent -5.1,-2.23 5.1,3.1
TP-R30 [mil]
  round 30 smd paste-30 mask+3: 1(0,0)
  body extent -18,-18 18,18, height 10
TSSOP50P810X120_HS-57N [mm] "TSSOP, 56-Leads, Body 14.00x6.10mm, Pitch 0.50mm, Thermal Pad 6.35x3.61mm, IPC Medium Density"
  oval 1.4x0.3 smd: 1(-3.8,6.75) 2(-3.8,6.25) 3(-3.8,5.75) 4(-3.8,5.25) 5(-3.8,4.75) 6(-3.8,4.25) 7(-3.8,3.75) 8(-3.8,3.25) 9(-3.8,2.75) 10(-3.8,2.25) 11(-3.8,1.75) 12(-3.8,1.25) 13(-3.8,0.75) 14(-3.8,0.25) 15(-3.8,-0.25) 16(-3.8,-0.75) 17(-3.8,-1.25) 18(-3.8,-1.75) 19(-3.8,-2.25) 20(-3.8,-2.75) 21(-3.8,-3.25) 22(-3.8,-3.75) 23(-3.8,-4.25) 24(-3.8,-4.75) 25(-3.8,-5.25) 26(-3.8,-5.75) 27(-3.8,-6.25) 28(-3.8,-6.75) 29(3.8,-6.75) 30(3.8,-6.25) 31(3.8,-5.75) 32(3.8,-5.25) 33(3.8,-4.75) 34(3.8,-4.25) 35(3.8,-3.75) 36(3.8,-3.25) 37(3.8,-2.75) 38(3.8,-2.25) 39(3.8,-1.75) 40(3.8,-1.25) 41(3.8,-0.75) 42(3.8,-0.25) 43(3.8,0.25) 44(3.8,0.75) 45(3.8,1.25) 46(3.8,1.75) 47(3.8,2.25) 48(3.8,2.75) 49(3.8,3.25) 50(3.8,3.75) 51(3.8,4.25) 52(3.8,4.75) 53(3.8,5.25) 54(3.8,5.75) 55(3.8,6.25) 56(3.8,6.75)
  rect 3.61x6.35 smd: 57(0,0)
  silkscreen extent -3.93,-7.05 2.7,7.57, body extent -3.1,-7.05 3.1,7.05, height 1.2
USB-C-SMD_TYPE-C-16PIN-2MD-073 [mm]
  rect 0.55x1.1 smd paste-100 mask+0.05: 1(0.05,-0.025) 2(0.85,-0.025) 11(5.65,-0.025) 12(6.45,-0.025)
  rect 0.3x1.1 smd paste-100 mask+0.05: 3(1.5,-0.025) 4(2,-0.025) 5(2.5,-0.025) 6(3,-0.025) 7(3.5,-0.025) 8(4,-0.025) 9(4.5,-0.025) 10(5,-0.025)
  oval 1.1x2 hole 0.6 slot 1.5 at 90 deg paste-2539.97 mask+0.05: 13(-1.075,-0.575) 14(7.575,-0.575)
  oval 1.2x1.8 hole 0.6 slot 1.2 at 90 deg paste-2539.97 mask+0.05: 13(-1.075,-4.775) 14(7.575,-4.775)
  Keep-Out Layer board cut-out: 0.71,-1.095 0.661,-0.923 0.533,-0.797 0.36,-0.751 0.187,-0.797 0.059,-0.923 0.01,-1.095 0.01,-1.095 0.059,-1.267 0.187,-1.393 0.36,-1.439 0.533,-1.393 0.661,-1.267 0.71,-1.095
  Keep-Out Layer board cut-out: 6.49,-1.095 6.441,-0.923 6.313,-0.797 6.14,-0.751 5.967,-0.797 5.839,-0.923 5.79,-1.095 5.79,-1.095 5.839,-1.267 5.967,-1.393 6.14,-1.439 6.313,-1.393 6.441,-1.267 6.49,-1.095
  Multi-Layer keep-out circle w0.254: c0.36,-1.095 r0.35
  Multi-Layer keep-out circle w0.254: c6.14,-1.095 r0.35
  silkscreen extent -1.25,-7.37 7.82,-1.8
XH254-2 [mil]
  round 60 hole 32: 1(-50,0) 2(50,0)
  silkscreen extent -150,-100 150,140, body extent -146,-93 146,133, height 276
XH254-6 [mil]
  round 60 hole 32: 1(-250,0) 1(-250,0) 2(-150,0) 3(-50,0) 4(50,0) 5(150,0) 6(250,0)
  silkscreen extent -350,-100 350,140

## Part data
C1 C6 C7 C8 C9 C10 C11 C30 C67: library part GRM188R71H104KA93D, "CAP CER 0.1UF 50V X7R 0603", Manufacturer="Murata Electronics North America", Operating Temperature="-55°C ~ 125°C", Package / Case="0603 (1608 Metric)", Ratings=-, Supplier Part Number 1=490-1519-2-ND, Temperature Coefficient=X7R, Tolerance=±10%, Voltage - Rated=50V, Applications="General Purpose", Capacitance=0.1uF, Category=Capacitors, ComponentLink1Description=http://www.murata.com/~/media/webrenewal/support/library/catalog/products/capacitor/mlcc/c02e.ashx?la=en-us, ComponentLink1URL=http://www.murata.com/~/media/webrenewal/support/library/catalog/products/capacitor/mlcc/c02e.ashx?la=en-us, Features=-, Height - Seated (Max)=-, Lead Spacing=-, Lead Style=-, Manufacturer Part Number=GRM188R71H104KA93D, Mounting Type="Surface Mount, MLCC", Packaging="Tape & Reel (TR)", Part Status=Active, Pricing 1="4000=0.01822, 8000=0.01663, 12000=0.01584 (USD)", Pricing 2="1=0.12, 10=0.084, 100=0.0396, 500=0.02778, 1000=0.023 (USD)", RoHS="RoHS Compliant", Size / Dimension="0.063\" L x 0.032\" W (1.60mm x 0.80mm)", Stock=19812000, Supplier 1=Digi-Key, Supplier 2=Digi-Key, Supplier Part Number 2=490-1519-1-ND, Thickness (Max)="0.035\" (0.90mm)"
C2 C3: library part GRM1885C1H100JA01D, "CAP CER 10PF 50V NP0 0603", Manufacturer="Murata Electronics North America", Operating Temperature="-55°C ~ 125°C", Package / Case="0603 (1608 Metric)", Ratings=-, Supplier Part Number 1=490-1403-1-ND, Temperature Coefficient="C0G, NP0", Tolerance=±5%, Voltage - Rated=50V, Applications="General Purpose", Capacitance=10pF, Category=Capacitors, ComponentLink1Description=http://www.murata.com/~/media/webrenewal/support/library/catalog/products/capacitor/mlcc/c02e.pdf, ComponentLink1URL=http://www.murata.com/~/media/webrenewal/support/library/catalog/products/capacitor/mlcc/c02e.pdf, Features=-, Height - Seated (Max)=-, Lead Spacing=-, Lead Style=-, Manufacturer Part Number=GRM1885C1H100JA01D, Mounting Type="Surface Mount, MLCC", Packaging="Cut Tape (CT)", Pricing 1="1=0.1, 10=0.041, 50=0.0222, 100=0.0187, 250=0.01532, 500=0.0131, 1000=0.0102 (USD)", RoHS="RoHS Compliant", Size / Dimension="0.063\" L x 0.031\" W (1.60mm x 0.80mm)", Stock 1=450321, Supplier 1=Digi-Key, Thickness (Max)="0.035\" (0.90mm)"
C4 C5 C20 C21 C25 C34 C35 C39 C40 C43 C48 C52 C53 C57 C58 C61 C66 C68: library part GRM188R61C225KE15D, "CAP CER 2.2UF 16V X5R 0603", Manufacturer="Murata Electronics North America", Operating Temperature="-55°C ~ 85°C", Package / Case="0603 (1608 Metric)", Ratings=-, Supplier Part Number 1=490-3296-1-ND, Temperature Coefficient=X5R, Tolerance=±10%, Voltage - Rated=16V, Applications="General Purpose", Capacitance=2.2µF, Category=Capacitors, ComponentLink1Description=http://www.murata.com/~/media/webrenewal/support/library/catalog/products/capacitor/mlcc/c02e.pdf, ComponentLink1URL=http://www.murata.com/~/media/webrenewal/support/library/catalog/products/capacitor/mlcc/c02e.pdf, Features=-, Height - Seated (Max)=-, Lead Spacing=-, Lead Style=-, Manufacturer Part Number=GRM188R61C225KE15D, Mounting Type="Surface Mount, MLCC", Packaging="Cut Tape (CT)", Pricing 1="1=0.12, 10=0.08, 50=0.046, 100=0.038, 250=0.032, 500=0.0268, 1000=0.022 (USD)", RoHS="RoHS Compliant", Size / Dimension="0.063\" L x 0.031\" W (1.60mm x 0.80mm)", Stock 1=1255740, Supplier 1=Digi-Key, Thickness (Max)="0.035\" (0.90mm)"
C12 C13 C14 C15: library part VZH221M1JTR-1313, "63v 220uF 贴片电容", Equivalent Series Resistance(ESR)=-, JLCPCB Part Class="Extended Part", LCSC Part Name="220uF ±20% 63V", Lifetime @ Temp=5000hrs@105℃, Manufacturer=lelon(立隆), Operating Temperature=-45℃~+105℃, Rated Voltage=63V, Tolerance=±20%, Add into BOM=yes, Convert to PCB=yes, Datasheet=https://atta.szlcsc.com/upload/public/pdf/source/20190107/C358632_9559F0E8F2A4CAD9C84FAF7E6C56D904.pdf, Device=VZH221M1JTR-1313, L=13.5mm, Manufacturer Part=VZH221M1JTR-1313, Name=220uF, Ripple Current=-, Supplier=LCSC, Supplier Footprint=SMD,D12.5xL13.5mm, Supplier Part=C249882, Symbol=VZH221M1J1313-TRO, φD=12.5mm
C16 C17 C18 C19 C28 C29 C42 C44 C47 C49 C60 C62 C65: library part C1210X7R475K630NT, "4.7uF 63V 1210封装", JLCPCB Part Class="Extended Part", LCSC Part Name="4.7uF 63V", Manufacturer=SANYEAR(叁叶源), Temperature Coefficient=X7R, Voltage Rated=63V, Add into BOM=yes, Convert to PCB=yes, Datasheet=https://atta.szlcsc.com/upload/public/pdf/source/20210902/8F39E0658D363F48630A7672568BDC14.pdf, Device=C1210X7R475K630NT, Manufacturer Part=C1210X7R475K630NT, Name=4.7uF, Supplier=LCSC, Supplier Footprint=1210, Supplier Part=C2911397, Symbol=C1210X7R475K630NT
C22 C23 C24: "CAP CER 4.7UF 50V X5R 0805", Manufacturer="Murata Electronics North America", Operating Temperature="-55°C ~ 85°C", Package / Case="0805 (2012 Metric)", Ratings=-, Supplier Part Number 1=490-10751-2-ND, Temperature Coefficient=X5R, Tolerance=±10%, Voltage - Rated=50V, Applications="General Purpose", Category=Capacitors, ComponentLink1Description=http://search.murata.co.jp/Ceramy/image/img/A01X/G101/ENG/GRM21BR61H475KE51-01.pdf, ComponentLink1URL=http://search.murata.co.jp/Ceramy/image/img/A01X/G101/ENG/GRM21BR61H475KE51-01.pdf, Features=-, Height - Seated (Max)=-, Lead Spacing=-, Lead Style=-, Manufacturer Part Number=GRM21BR61H475KE51L, Mounting Type="Surface Mount, MLCC", Packaging="Tape & Reel (TR)", Part Status=Active, Pricing 1="3000=0.08404, 6000=0.07774, 9000=0.07354 (USD)", Pricing 2="1=0.35, 10=0.242, 100=0.145, 500=0.10872, 1000=0.09181 (USD)", RoHS="RoHS Compliant", Size / Dimension="0.079\" L x 0.049\" W (2.00mm x 1.25mm)", Stock=15000, Supplier 1=Digi-Key, Supplier 2=Digi-Key, Supplier Part Number 2=490-10751-1-ND, Thickness (Max)="0.055\" (1.40mm)"
C26: library part GRM1885C1H271JA01D, "CAP CER 270PF 50V NP0 0603", Manufacturer="Murata Electronics North America", Operating Temperature="-55°C ~ 125°C", Package / Case="0603 (1608 Metric)", Ratings=-, Supplier Part Number 1=490-1437-1-ND, Temperature Coefficient="C0G, NP0", Tolerance=±5%, Voltage - Rated=50V, Applications="General Purpose", Capacitance=270pF, Category=Capacitors, ComponentLink1Description=http://www.murata.com/~/media/webrenewal/support/library/catalog/products/capacitor/mlcc/c02e.pdf, ComponentLink1URL=http://www.murata.com/~/media/webrenewal/support/library/catalog/products/capacitor/mlcc/c02e.pdf, Features=-, Height - Seated (Max)=-, Lead Spacing=-, Lead Style=-, Manufacturer Part Number=GRM1885C1H271JA01D, Mounting Type="Surface Mount, MLCC", Packaging="Cut Tape (CT)", Pricing 1="1=0.1, 10=0.048, 50=0.026, 100=0.022, 250=0.018, 500=0.0154, 1000=0.012 (USD)", RoHS="RoHS Compliant", Size / Dimension="0.063\" L x 0.031\" W (1.60mm x 0.80mm)", Stock 1=46048, Supplier 1=Digi-Key, Thickness (Max)="0.035\" (0.90mm)"
C27: library part GRM1885C2A820JA01D, "CAP CER 82PF 100V NP0 0603", Manufacturer="Murata Electronics North America", Operating Temperature="-55°C ~ 125°C", Package / Case="0603 (1608 Metric)", Ratings=-, Supplier Part Number 1=490-1349-1-ND, Temperature Coefficient="C0G, NP0", Tolerance=±5%, Voltage - Rated=100V, Applications="General Purpose", Capacitance=82pF, Category=Capacitors, ComponentLink1Description=http://www.murata.com/~/media/webrenewal/support/library/catalog/products/capacitor/mlcc/c02e.pdf, ComponentLink1URL=http://www.murata.com/~/media/webrenewal/support/library/catalog/products/capacitor/mlcc/c02e.pdf, Features=-, Height - Seated (Max)=-, Lead Spacing=-, Lead Style=-, Manufacturer Part Number=GRM1885C2A820JA01D, Mounting Type="Surface Mount, MLCC", Packaging="Cut Tape (CT)", Pricing 1="1=0.1, 10=0.052, 50=0.028, 100=0.0237, 250=0.01936, 500=0.01656, 1000=0.0129 (USD)", RoHS="RoHS Compliant", Size / Dimension="0.063\" L x 0.031\" W (1.60mm x 0.80mm)", Stock 1=58970, Supplier 1=Digi-Key, Thickness (Max)="0.035\" (0.90mm)"
C31: library part T495C686M016ATE250, "CAP TANT 68UF 16V 20% 2312 250mOhm", ESR (Equivalent Series Resistance)="250 mOhm", Lifetime @ Temp.="2000 Hrs @ 85°C", Manufacturer=KEMET, Manufacturer Size Code=C, Operating Temperature="-55°C ~ 125°C", Package / Case="2312 (6032 Metric)", Supplier Part Number 1=399-10452-1-ND, Tolerance=±20%, Category=Capacitors, ComponentLink1Description=https://search.kemet.com/component-edge/download/datasheet/T495C686M016ATE250.pdf, ComponentLink1URL=https://search.kemet.com/component-edge/download/datasheet/T495C686M016ATE250.pdf, Failure Rate=-, Features="General Purpose", Height - Seated (Max)="0.110\" (2.80mm)", Lead Spacing=-, Manufacturer Part Number=T495C686M016ATE250, Mounting Type="Surface Mount", Packaging="Cut Tape (CT)", Part Status=Active, Pricing 1="1=0.98, 10=0.747, 100=0.5345 (USD)", Pricing 2="500=0.35986, 1000=0.30988, 2500=0.28988, 5000=0.27608 (USD)", RoHS="RoHS Compliant", Size / Dimension="0.236\" L x 0.126\" W (6.00mm x 3.20mm)", Stock=39507, Supplier 1=Digi-Key, Supplier 2=Digi-Key, Supplier Part Number 2=399-10452-2-ND, Type=Molded
C32 C33 C36 C37 C50 C51 C54 C55: library part GRM188R71H223KA01D, "CAP CER 0.022UF 50V X7R 0603", Manufacturer="Murata Electronics North America", Operating Temperature="-55°C ~ 125°C", Package / Case="0603 (1608 Metric)", Ratings=-, Supplier Part Number 1=490-1517-2-ND, Temperature Coefficient=X7R, Tolerance=±10%, Voltage - Rated=50V, Applications="General Purpose", Capacitance=0.022µF, Category=Capacitors, ComponentLink1Description=http://search.murata.co.jp/Ceramy/image/img/A01X/G101/ENG/GRM188R71H223KA01-01.pdf, ComponentLink1URL=http://search.murata.co.jp/Ceramy/image/img/A01X/G101/ENG/GRM188R71H223KA01-01.pdf, Features=-, Height - Seated (Max)=-, Lead Spacing=-, Lead Style=-, Manufacturer Part Number=GRM188R71H223KA01D, Mounting Type="Surface Mount, MLCC", Packaging="Tape & Reel (TR)", Part Status=Active, Pricing 1="4000=0.01518, 8000=0.01386, 12000=0.0132 (USD)", Pricing 2="1=0.11, 10=0.083, 100=0.0372, 500=0.02656, 1000=0.02087 (USD)", RoHS="RoHS Compliant", Size / Dimension="0.063\" L x 0.032\" W (1.60mm x 0.80mm)", Stock=608000, Supplier 1=Digi-Key, Supplier 2=Digi-Key, Supplier Part Number 2=490-1517-1-ND, Thickness (Max)="0.035\" (0.90mm)"
C38 C41 C45 C46 C56 C59 C63 C64: library part GRM1885C1H222JA01D, "CAP CER 2200PF 50V NP0 0603", Manufacturer="Murata Electronics North America", Operating Temperature="-55°C ~ 125°C", Package / Case="0603 (1608 Metric)", Ratings=-, Supplier Part Number 1=490-1459-1-ND, Temperature Coefficient="C0G, NP0", Tolerance=±5%, Voltage - Rated=50V, Applications="General Purpose", Capacitance=2200pF, Category=Capacitors, ComponentLink1Description=http://www.murata.com/~/media/webrenewal/support/library/catalog/products/capacitor/mlcc/c02e.ashx, ComponentLink1URL=http://www.murata.com/~/media/webrenewal/support/library/catalog/products/capacitor/mlcc/c02e.ashx, Features=-, Height - Seated (Max)=-, Lead Spacing=-, Lead Style=-, Mounting Type="Surface Mount, MLCC", Packaging="Cut Tape (CT)", Part Status=Active, Pricing 1="1=0.11, 10=0.08, 25=0.058, 50=0.0434, 100=0.0355, 250=0.02972, 500=0.02536, 1000=0.01992 (USD)", RoHS="RoHS Compliant", Size / Dimension="0.063\" L x 0.031\" W (1.60mm x 0.80mm)", Stock 1=850589, Supplier 1=Digi-Key, Thickness (Max)="0.035\" (0.90mm)"
CN1 CN2: "6p 90度弯插", Current Rating (Max)=3A, JLCPCB Part Class="Extended Part", LCSC Part Name="1x6P 间距:2.5mm 弯插 系列:XH", Manufacturer="XKB Connection(中国星坤)", Operating Temperature Range=-, Add into BOM=yes, Contact Material=黄铜, Contact Plating=锡, Convert to PCB=yes, Datasheet=https://atta.szlcsc.com/upload/public/pdf/source/20211009/984C14C41D2B1156BCF8EEF5D296E395.pdf, Device=X8821WR-06S-N0SN, Manufacturer Part=X8821WR-06S-N0SN, Mounting Style=弯插, Name=X8821WR-06S-N0SN, Number of Pins=6P, Number of PINs Per Row=6, Number of Rows=1, Pins Structure=1x6P, Pitch=2.5mm, Reference Series=XH, Row Spacing=-, Supplier=LCSC, Supplier Footprint=弯插,P=2.54mm, Supplier Part=C388743, Symbol=X8821WR-06S-N0SN
D1: library part "0603 绿灯", "发光二极管", Package=0603, SuppliersPartNumber=C72043, ComponentLink1Description=供应商链接, ComponentLink1URL=http://www.szlcsc.com/product/details_73152.html, Supplier=LC
D2 D3: "Rectifier Diode, Single, 40 V, 1 A, SOD-123FL, 2, 550 mV"
FID1 FID2 FID3 FID4: "1mm Fiducial with 2mm soldermask, 3mm keepout"
FPC1: "显示屏 8P FPC接口", JLCPCB Part Class="Extended Part", LCSC Part Name="间距:0.5mm P数:8P 翻盖式 下接", Manufacturer=JS(钜硕电子), Add into BOM=yes, Contact Type=下接, Convert to PCB=yes, Datasheet=https://atta.szlcsc.com/upload/public/pdf/source/20190816/C413942_2A72D1AC756EAE17EEDF756A339D4500.pdf, Device=AFC01-S08FCA-00, FFC, FCB Thickness=0.3mm, Height Above Board=2mm, Locking Feature=翻盖式, Manufacturer Part=AFC01-S08FCA-00, Mounting Type=卧贴, Name=AFC01-S08FCA-00, Number of Contacts=8P, Pitch=0.5mm, Supplier=LCSC, Supplier Footprint=SMD,P=0.5mm,卧贴, Supplier Part=C262657, Symbol=AFC01-S08FCA-00
H1 H2 H3 H4: "M3 Hole with no copper"
J1: library part "Header 3", "Header, 3-Pin", LatestRevisionDate=17-Jul-2002, LatestRevisionNote="Re-released for DXP Platform.", Publisher="Altium Limited"
L1: library part NR6028T220M, "INDUCTOR 22UH 1.4A 175.5 MOHM"
P1 P3 P4: "Header, 6-Pin", LatestRevisionDate=17-Jul-2002, LatestRevisionNote="Re-released for DXP Platform.", Publisher="Altium Limited"
P2 P5: "Header, 2-Pin", LatestRevisionDate=17-Jul-2002, LatestRevisionNote="Re-released for DXP Platform.", Publisher="Altium Limited"
P6: "Header, 3-Pin", LatestRevisionDate=17-Jul-2002, LatestRevisionNote="Re-released for DXP Platform.", Publisher="Altium Limited"
Q1: library part 8550_SOT-23, "PNP型小功率三极管", HelpURL=http://pdf1.alldatasheetcn.com/datasheet-pdf/view/33679/WINGS/9014.html
Q2 Q3 Q4 Q5 Q6 Q7 Q8 Q9 Q10 Q11 Q12 Q13 Q14 Q15 Q16 Q17 Q18 Q19 Q20 Q21 Q22 Q23 Q24 Q25 Q26 Q27 Q28 Q29: "MOSFET N-CH 60V SO8FL", Current - Continuous Drain (Id) @ 25°C=-, Drive Voltage (Max Rds On,  Min Rds On)="4.5V, 10V", Input Capacitance (Ciss) (Max) @ Vds="3600pF @ 25V", Manufacturer="ON Semiconductor", Manufacturer Part Number=NTMFS5C628NLT1G, Operating Temperature="-55°C ~ 175°C (TJ)", Package / Case=8-PowerTDFN, Power Dissipation (Max)="3.7W (Ta), 110W (Tc)", Supplier Device Package="5-DFN (5x6) (8-SOFL)", Supplier Part Number 1=NTMFS5C628NLT1GOSCT-ND, Category="Discrete Semiconductor Products", ComponentLink1Description=http://www.onsemi.com/pub/Collateral/NTMFS5C628NL-D.PDF, ComponentLink1URL=http://www.onsemi.com/pub/Collateral/NTMFS5C628NL-D.PDF, FET Feature=-, FET Type=N-Channel, Gate Charge (Qg) (Max) @ Vgs="52nC @ 10V", Mounting Type="Surface Mount", Packaging="Cut Tape (CT)", Part Status=Active, Pricing 1="1=1.8, 10=1.627, 100=1.3078, 500=1.01716 (USD)", Pricing 2="1500=0.81823 (USD)", Rds On (Max) @ Id, Vgs="2.4 mOhm @ 50A, 10V", RoHS="RoHS Compliant", Stock=1490, Supplier 1=Digi-Key, Supplier 2=Digi-Key, Supplier Part Number 2=NTMFS5C628NLT1GOSTR-ND, Technology="MOSFET (Metal Oxide)", Vgs (Max)=±20V, Vgs(th) (Max) @ Id="2V @ 135µA"
R1 R3 R5 R6 R8 R31 R32 R46 R47: library part RC0603FR-0722RL, "RES SMD 22 OHM 1% 1/10W 0603", Manufacturer=Yageo, Operating Temperature="-55°C ~ 155°C", Package / Case="0603 (1608 Metric)", Power (Watts)="0.1W, 1/10W", Resistance (Ohms)=22, Supplier Device Package=0603, Supplier Part Number 1=311-22.0HRCT-ND, Temperature Coefficient=±100ppm/°C, Tolerance=±1%, Category=Resistors, ComponentLink1Description=http://www.yageo.com/documents/recent/PYu-RC_Group_51_RoHS_L_04.pdf, ComponentLink1URL=http://www.yageo.com/documents/recent/PYu-RC_Group_51_RoHS_L_04.pdf, Composition="Thick Film", Features="Moisture Resistant", Height="0.022\" (0.55mm)", Manufacturer Part Number=RC0603FR-0722RL, Number of Terminations=2, Packaging="Cut Tape (CT)", Pricing 1="1=0.1, 10=0.014, 25=0.01, 100=0.0057, 250=0.00436, 500=0.00348, 1000=0.00257, 2500=0.00223 (USD)", RoHS="RoHS Compliant", Size / Dimension="0.063\" L x 0.031\" W (1.60mm x 0.80mm)", Stock 1=575303, Supplier 1=Digi-Key
R2 R17 R18: library part RC0603FR-071KL, "RES SMD 1K OHM 1% 1/10W 0603", Manufacturer=Yageo, Operating Temperature="-55°C ~ 155°C", Package / Case="0603 (1608 Metric)", Power (Watts)="0.1W, 1/10W", Supplier Device Package=0603, Supplier Part Number 1=311-1.00KHRCT-ND, Temperature Coefficient=±100ppm/°C, Tolerance=±1%, Category=Resistors, ComponentLink1Description=http://www.yageo.com/documents/recent/PYu-RC_Group_51_RoHS_L_04.pdf, ComponentLink1URL=http://www.yageo.com/documents/recent/PYu-RC_Group_51_RoHS_L_04.pdf, Composition="Thick Film", Features="Moisture Resistant", Height="0.022\" (0.55mm)", Manufacturer Part Number=RC0603FR-071KL, Number of Terminations=2, Packaging="Cut Tape (CT)", Pricing 1="1=0.1, 10=0.014, 25=0.01, 100=0.0057, 250=0.00436, 500=0.00348, 1000=0.00257, 2500=0.00223 (USD)", Resistance (Ohms)=1k, RoHS="RoHS Compliant", Size / Dimension="0.063\" L x 0.031\" W (1.60mm x 0.80mm)", Stock 1=6734836, Supplier 1=Digi-Key
R4 R29 R30 R44 R45: library part RC0603FR-07120RL, "RES SMD 120 OHM 1% 1/10W 0603", Manufacturer=Yageo, Operating Temperature="-55°C ~ 155°C", Package / Case="0603 (1608 Metric)", Power (Watts)="0.1W, 1/10W", Resistance (Ohms)=120, Supplier Device Package=0603, Supplier Part Number 1=311-120HRCT-ND, Temperature Coefficient=±100ppm/°C, Tolerance=±1%, Category=Resistors, ComponentLink1Description=http://www.yageo.com/documents/recent/PYu-RC_Group_51_RoHS_L_04.pdf, ComponentLink1URL=http://www.yageo.com/documents/recent/PYu-RC_Group_51_RoHS_L_04.pdf, Composition="Thick Film", Features="Moisture Resistant", Height="0.022\" (0.55mm)", Manufacturer Part Number=RC0603FR-07120RL, Number of Terminations=2, Packaging="Cut Tape (CT)", Pricing 1="1=0.1, 10=0.014, 25=0.01, 100=0.0057, 250=0.00436, 500=0.00348, 1000=0.00257, 2500=0.00223 (USD)", RoHS="RoHS Compliant", Size / Dimension="0.063\" L x 0.031\" W (1.60mm x 0.80mm)", Stock 1=1545282, Supplier 1=Digi-Key
R7 R16: library part RC0603FR-0710KL, "RES SMD 10K OHM 1% 1/10W 0603", Manufacturer=Yageo, Operating Temperature="-55°C ~ 155°C", Package / Case="0603 (1608 Metric)", Power (Watts)="0.1W, 1/10W", Resistance (Ohms)=10k, Supplier Device Package=0603, Supplier Part Number 1=311-10.0KHRCT-ND, Temperature Coefficient=±100ppm/°C, Tolerance=±1%, Category=Resistors, ComponentLink1Description=http://www.yageo.com/documents/recent/PYu-RC_Group_51_RoHS_L_04.pdf, ComponentLink1URL=http://www.yageo.com/documents/recent/PYu-RC_Group_51_RoHS_L_04.pdf, Composition="Thick Film", Features="Moisture Resistant", Height="0.022\" (0.55mm)", Manufacturer Part Number=RC0603FR-0710KL, Number of Terminations=2, Packaging="Cut Tape (CT)", Pricing 1="1=0.1, 10=0.014, 25=0.01, 100=0.0057, 250=0.00436, 500=0.00348, 1000=0.00257, 2500=0.00223 (USD)", RoHS="RoHS Compliant", Size / Dimension="0.063\" L x 0.031\" W (1.60mm x 0.80mm)", Stock 1=13504930, Supplier 1=Digi-Key
R9 R10 R11 R12 R13 R14 R20 R27 R39 R55: library part RC0603FR-073K3L, "RES SMD 3.3K OHM 1% 1/10W 0603", Manufacturer=Yageo, Operating Temperature="-55°C ~ 155°C", Package / Case="0603 (1608 Metric)", Power (Watts)="0.1W, 1/10W", Supplier Device Package=0603, Supplier Part Number 1=311-3.30KHRCT-ND, Temperature Coefficient=±100ppm/°C, Tolerance=±1%, Category=Resistors, ComponentLink1Description=http://www.yageo.com/documents/recent/PYu-RC_Group_51_RoHS_L_04.pdf, ComponentLink1URL=http://www.yageo.com/documents/recent/PYu-RC_Group_51_RoHS_L_04.pdf, Composition="Thick Film", Features="Moisture Resistant", Height="0.022\" (0.55mm)", Manufacturer Part Number=RC0603FR-073K3L, Number of Terminations=2, Packaging="Cut Tape (CT)", Pricing 1="1=0.1, 10=0.014, 25=0.01, 100=0.0057, 250=0.00436, 500=0.00348, 1000=0.00257, 2500=0.00223 (USD)", Resistance (Ohms)=3.3k, RoHS="RoHS Compliant", Size / Dimension="0.063\" L x 0.031\" W (1.60mm x 0.80mm)", Stock 1=420019, Supplier 1=Digi-Key
R15 R23: library part RC0603FR-0747KL, "RES SMD 47K OHM 1% 1/10W 0603", Manufacturer=Yageo, Operating Temperature="-55°C ~ 155°C", Package / Case="0603 (1608 Metric)", Power (Watts)="0.1W, 1/10W", Resistance (Ohms)=47k, Supplier Device Package=0603, Supplier Part Number 1=311-47.0KHRCT-ND, Temperature Coefficient=±100ppm/°C, Tolerance=±1%, Category=Resistors, ComponentLink1Description=http://www.yageo.com/documents/recent/PYu-RC_Group_51_RoHS_L_04.pdf, ComponentLink1URL=http://www.yageo.com/documents/recent/PYu-RC_Group_51_RoHS_L_04.pdf, Composition="Thick Film", Features="Moisture Resistant", Height="0.022\" (0.55mm)", Manufacturer Part Number=RC0603FR-0747KL, Number of Terminations=2, Packaging="Cut Tape (CT)", Pricing 1="1=0.1, 10=0.014, 25=0.01, 100=0.0057, 250=0.00436, 500=0.00348, 1000=0.00257, 2500=0.00223 (USD)", RoHS="RoHS Compliant", Size / Dimension="0.063\" L x 0.031\" W (1.60mm x 0.80mm)", Stock 1=930868, Supplier 1=Digi-Key
R19 R38 R53: "THERMISTOR 10K OHM NTC 0402 SMD"
R21: library part RC0603FR-07220KL, "RES SMD 220K OHM 1% 1/10W 0603", Manufacturer=Yageo, Operating Temperature="-55°C ~ 155°C", Package / Case="0603 (1608 Metric)", Power (Watts)="0.1W, 1/10W", Supplier Device Package=0603, Supplier Part Number 1=311-220KHRCT-ND, Temperature Coefficient=±100ppm/°C, Tolerance=±1%, Category=Resistors, ComponentLink1Description=http://www.yageo.com/documents/recent/PYu-RC_Group_51_RoHS_L_04.pdf, ComponentLink1URL=http://www.yageo.com/documents/recent/PYu-RC_Group_51_RoHS_L_04.pdf, Composition="Thick Film", Features="Moisture Resistant", Height="0.022\" (0.55mm)", Manufacturer Part Number=RC0603FR-07220KL, Number of Terminations=2, Packaging="Cut Tape (CT)", Pricing 1="1=0.1, 10=0.014, 25=0.01, 100=0.0057, 250=0.00436, 500=0.00348, 1000=0.00257, 2500=0.00223 (USD)", Resistance (Ohms)=220k, RoHS="RoHS Compliant", Size / Dimension="0.063\" L x 0.031\" W (1.60mm x 0.80mm)", Stock 1=204390, Supplier 1=Digi-Key
R22 R28 R43: library part RC0603FR-0718KL, "RES SMD 18K OHM 1% 1/10W 0603", Manufacturer=Yageo, Operating Temperature="-55°C ~ 155°C", Package / Case="0603 (1608 Metric)", Power (Watts)="0.1W, 1/10W", Supplier Device Package=0603, Supplier Part Number 1=311-18.0KHRCT-ND, Temperature Coefficient=±100ppm/°C, Tolerance=±1%, Category=Resistors, ComponentLink1Description=http://www.yageo.com/documents/recent/PYu-RC_Group_51_RoHS_L_04.pdf, ComponentLink1URL=http://www.yageo.com/documents/recent/PYu-RC_Group_51_RoHS_L_04.pdf, Composition="Thick Film", Features="Moisture Resistant", Height="0.022\" (0.55mm)", Manufacturer Part Number=RC0603FR-0718KL, Number of Terminations=2, Packaging="Cut Tape (CT)", Pricing 1="1=0.1, 10=0.014, 25=0.01, 100=0.0057, 250=0.00436, 500=0.00348, 1000=0.00257, 2500=0.00223 (USD)", Resistance (Ohms)=18k, RoHS="RoHS Compliant", Size / Dimension="0.063\" L x 0.031\" W (1.60mm x 0.80mm)", Stock 1=0, Supplier 1=Digi-Key
R24 R25 R26 R33 R34 R35 R40 R41 R42 R48 R49 R50 R54 R56: library part RC0603FR-072R2L, "RES SMD 2.2 OHM 1% 1/10W 0603", Manufacturer=Yageo, Operating Temperature="-55°C ~ 155°C", Package / Case="0603 (1608 Metric)", Power (Watts)="0.1W, 1/10W", Resistance (Ohms)=2.2, Supplier Device Package=0603, Supplier Part Number 1=311-2.2HRCT-ND, Temperature Coefficient=±200ppm/°C, Tolerance=±1%, Category=Resistors, ComponentLink1Description=http://www.yageo.com/documents/recent/PYu-RC_Group_51_RoHS_L_04.pdf, ComponentLink1URL=http://www.yageo.com/documents/recent/PYu-RC_Group_51_RoHS_L_04.pdf, Composition="Thick Film", Features="Moisture Resistant", Height="0.022\" (0.55mm)", Manufacturer Part Number=RC0603FR-072R2L, Number of Terminations=2, Packaging="Cut Tape (CT)", Pricing 1="1=0.1, 10=0.02, 25=0.0144, 100=0.0082, 250=0.00624, 500=0.00498, 1000=0.00367, 2500=0.00319 (USD)", RoHS="RoHS Compliant", Size / Dimension="0.063\" L x 0.031\" W (1.60mm x 0.80mm)", Stock 1=16531, Supplier 1=Digi-Key
R36 R37 R51 R52: "RES SMD 0.0005 OHM 1% 3W 2512", Manufacturer=Riedon, Operating Temperature="-55°C ~ 170°C", Package / Case="2512 (6432 Metric)", Power (Watts)=3W, Supplier Device Package=2512, Supplier Part Number 1=696-1183-2-ND, Temperature Coefficient=±100ppm/°C, Tolerance=±1%, Category=Resistors, ComponentLink1Description=http://riedon.com/media/pdf/CSR.pdf, ComponentLink1URL=http://riedon.com/media/pdf/CSR.pdf, Composition="Metal Element", Failure Rate=-, Features="Current Sense", Height - Seated (Max)="0.057\" (1.45mm)", Manufacturer Part Number=CSR2512C0R0005F, Packaging="Tape & Reel (TR)", Part Status=Active, Pricing 1="2000=0.19817, 6000=0.1937, 10000=0.187, 50000=0.18148 (USD)", Pricing 2="1=0.69, 10=0.574, 25=0.4916, 50=0.4426, 100=0.3852, 250=0.3442, 500=0.27864, 1000=0.22536 (USD)", RoHS="RoHS Compliant", Size / Dimension="0.250\" L x 0.118\" W (6.35mm x 3.00mm)", Stock=2000, Supplier 1=Digi-Key, Supplier 2=Digi-Key, Supplier Part Number 2=696-1183-1-ND
SW1: "单刀拨码开关", Color=红色, JLCPCB Part Class="Extended Part", LCSC Part Name=红色宽体1位顶拨插件, Manufacturer=YE, Operating Life=-, Add into BOM=yes, Circuit=单刀单掷, Convert to PCB=yes, Datasheet=https://atta.szlcsc.com/upload/public/pdf/source/20240423/2AB41BE17D24959C6789B2A71E54D492.pdf, Device=DSWB01LHGET, Lead Pitch=-, Manufacturer Part=DSWB01LHGET, Name=DSWB01LHGET, Number of Positions=1位, Supplier=LCSC, Supplier Footprint=插件,9.9x4mm, Supplier Part=C126888, Symbol=DSWB01LHGET, Type=平拨,凸起式
SW2: "轻触开关", Actuator/Cap Color=白色带淡绿, Contact Current=50mA, Insulation Resistance=-, JLCPCB Part Class="Extended Part", LCSC Part Name="6*3.6*2.5mm 立贴 轻触开关", Manufacturer="XKB Connectivity(中国星坤)", Operating Force=260gf, Operating Temperature=-30℃~+85℃, Voltage Rating (DC)=12V, Actuator Style=矩形按钮, Add into BOM=yes, Circuit=单刀单掷, Convert to PCB=yes, Datasheet=https://atta.szlcsc.com/upload/public/pdf/source/20200227/C318938_C2E53B1EEDE37D980A33616AC086DE53.pdf, Device=TS-1101-C-W, IP Rating=-, Manufacturer Part=TS-1101-C-W, Mechanical Life=5万次, Mounting Style=立贴, Name=TS-1101-C-W, Pin Style=-, Power Rating=-, Strike Gundam=不带, Supplier=LCSC, Supplier Footprint=SMD, Supplier Part=C318938, Switch Height=2.5mm, Switch Length=6mm, Switch Width=3.6mm, Symbol=TS-1101-C-W, Voltage Rating (AC)=-, With Lamp=无
TP1 TP2 TP3 TP4 TP5 TP6: "SMD test pin"
U1: Manufacturer="Texas Instruments", Manufacturer Part Number=SN65HVD232DR, Operating Temperature="-40°C ~ 85°C", Package / Case="8-SOIC (0.154\", 3.90mm Width)", Supplier Device Package=8-SOIC, Supplier Part Number 1=296-26344-2-ND, Voltage - Supply="3 V ~ 3.6 V", Category="Integrated Circuits (ICs)", ComponentLink1Description=http://www.ti.com/lit/ds/symlink/sn65hvd230.pdf, ComponentLink1URL=http://www.ti.com/lit/ds/symlink/sn65hvd230.pdf, Data Rate=1Mbps, Duplex=Half, Mounting Type="Surface Mount", Number of Drivers/Receivers=1/1, Packaging="Tape & Reel (TR)", Part Status=Active, Pricing 1="2500=0.84375 (USD)", Pricing 2="1=2.05, 10=1.842, 100=1.4809, 500=1.21668, 1000=1.00811 (USD)", Protocol=CAN, RoHS="RoHS Compliant", Stock=5000, Supplier 1=Digi-Key, Supplier 2=Digi-Key, Supplier Part Number 2=296-26344-1-ND, Type=Transceiver
U2: JLCPCB Part Class="Extended Part", LCSC Part Name="USB转串口芯片 CH340", Manufacturer=WCH(南京沁恒), Add into BOM=yes, Convert to PCB=yes, Datasheet=https://atta.szlcsc.com/upload/public/pdf/source/20230530/6E401E9554E9F5311886CC8B3F89B62E.pdf, Device=CH340N, Manufacturer Part=CH340N, Name=CH340N, Supplier=LCSC, Supplier Footprint=SOP-8, Supplier Part=C2977777, Symbol=CH340N_C2977777